# Altium PCB P450_FJ_P_A_V2.3_F.PcbDoc
Units mil, origin at the board's own origin, x right, y up, seen from the top; angles counter-clockwise.
Board outline 3672.05 x 2795.28 mil, 4 copper layers (Top Layer, POWER, GND, Bottom Layer); 158 components, 72 nets, 807 pads, 85 vias.
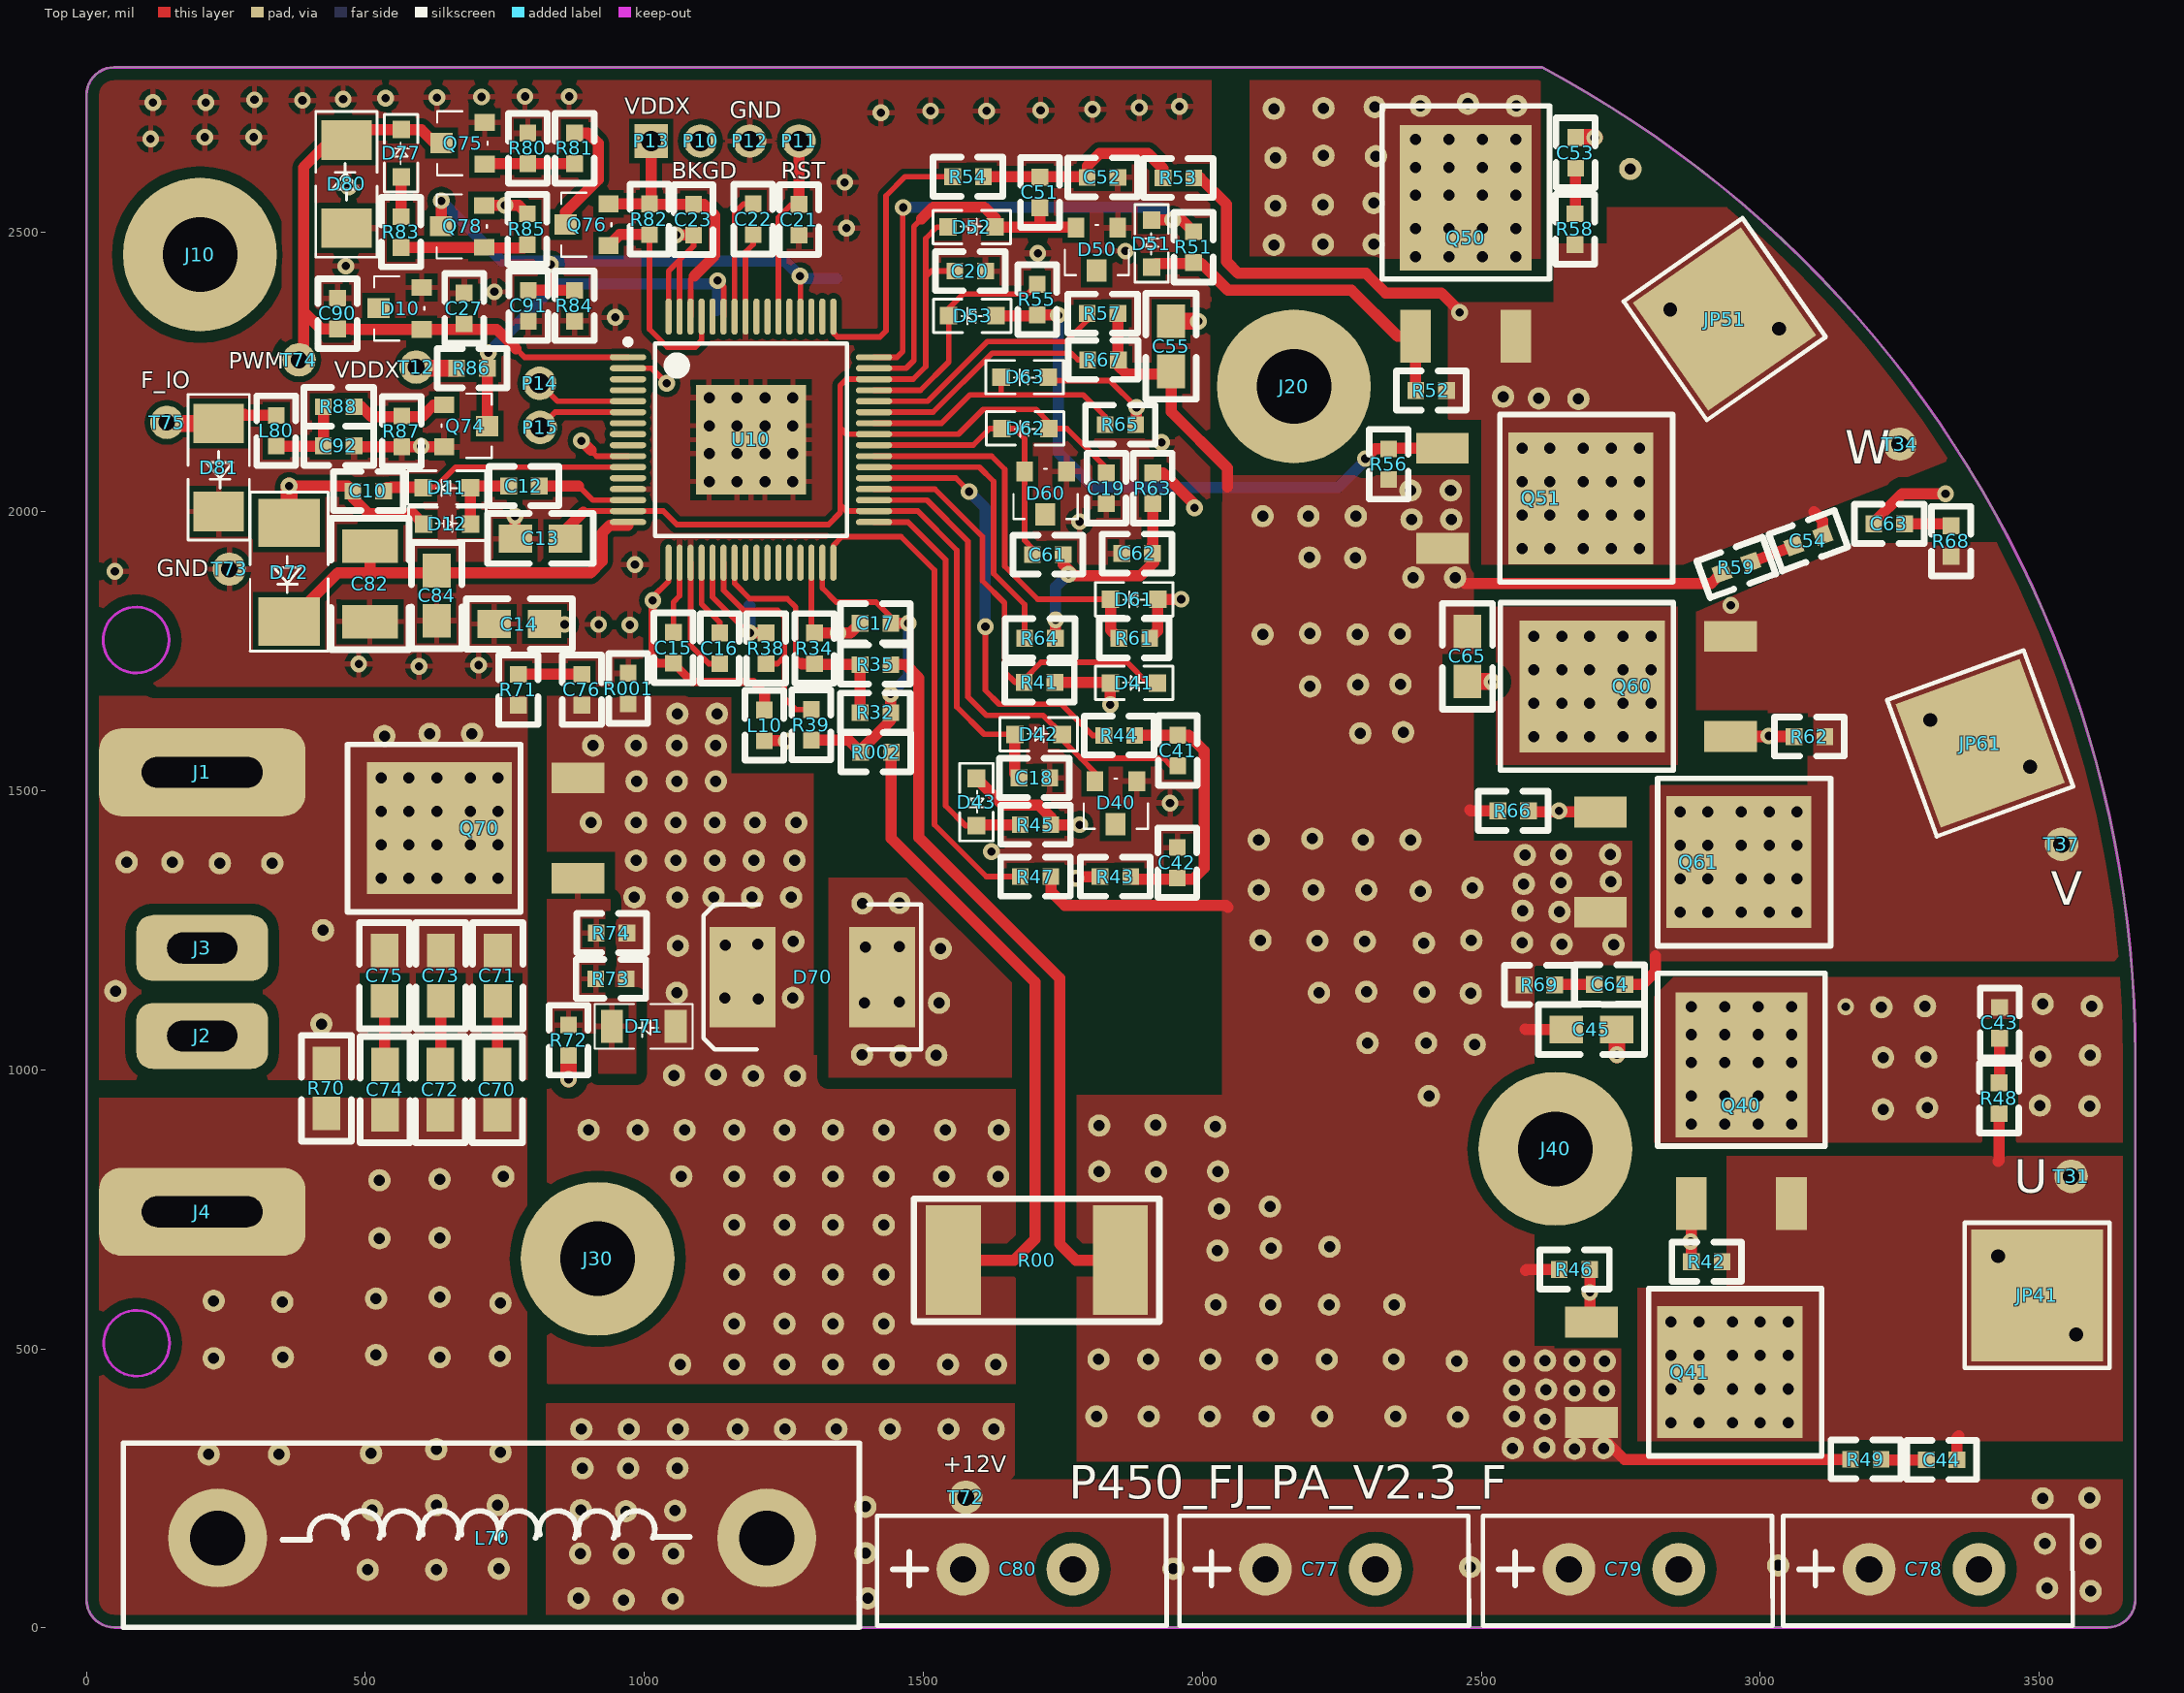
[diagram p0: Top Layer view]
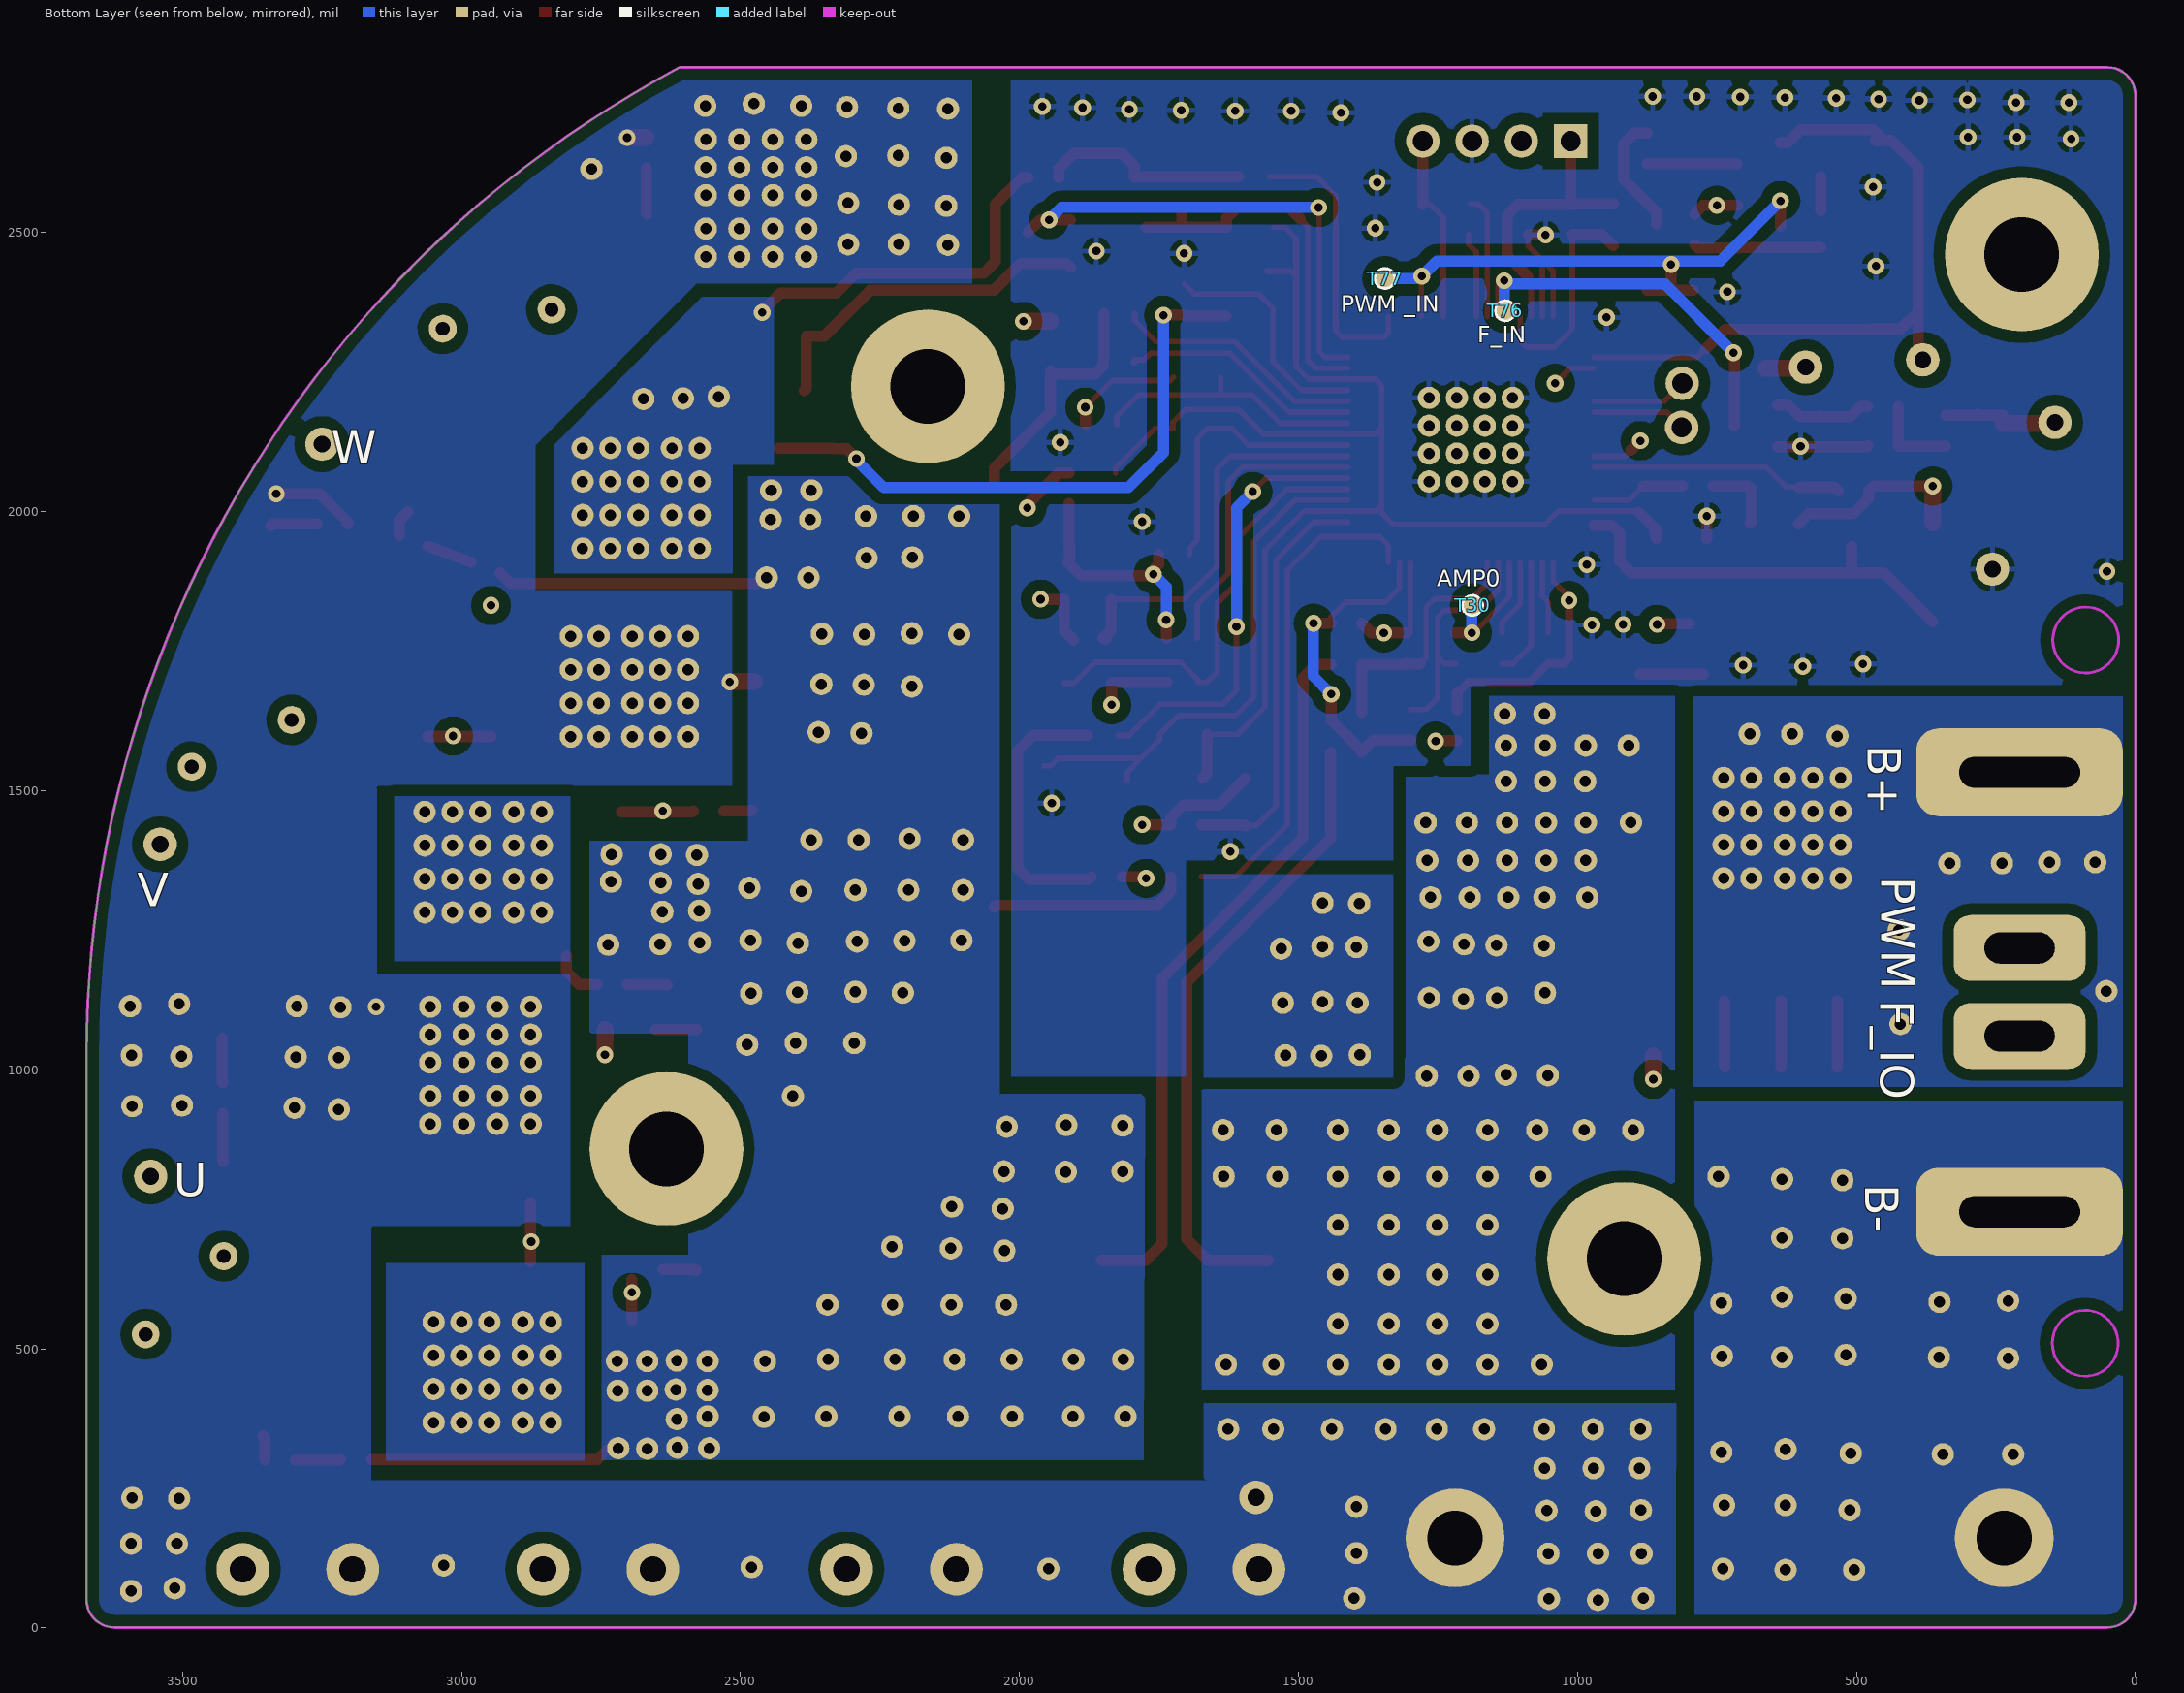
[diagram p1: Bottom Layer view, seen from below]
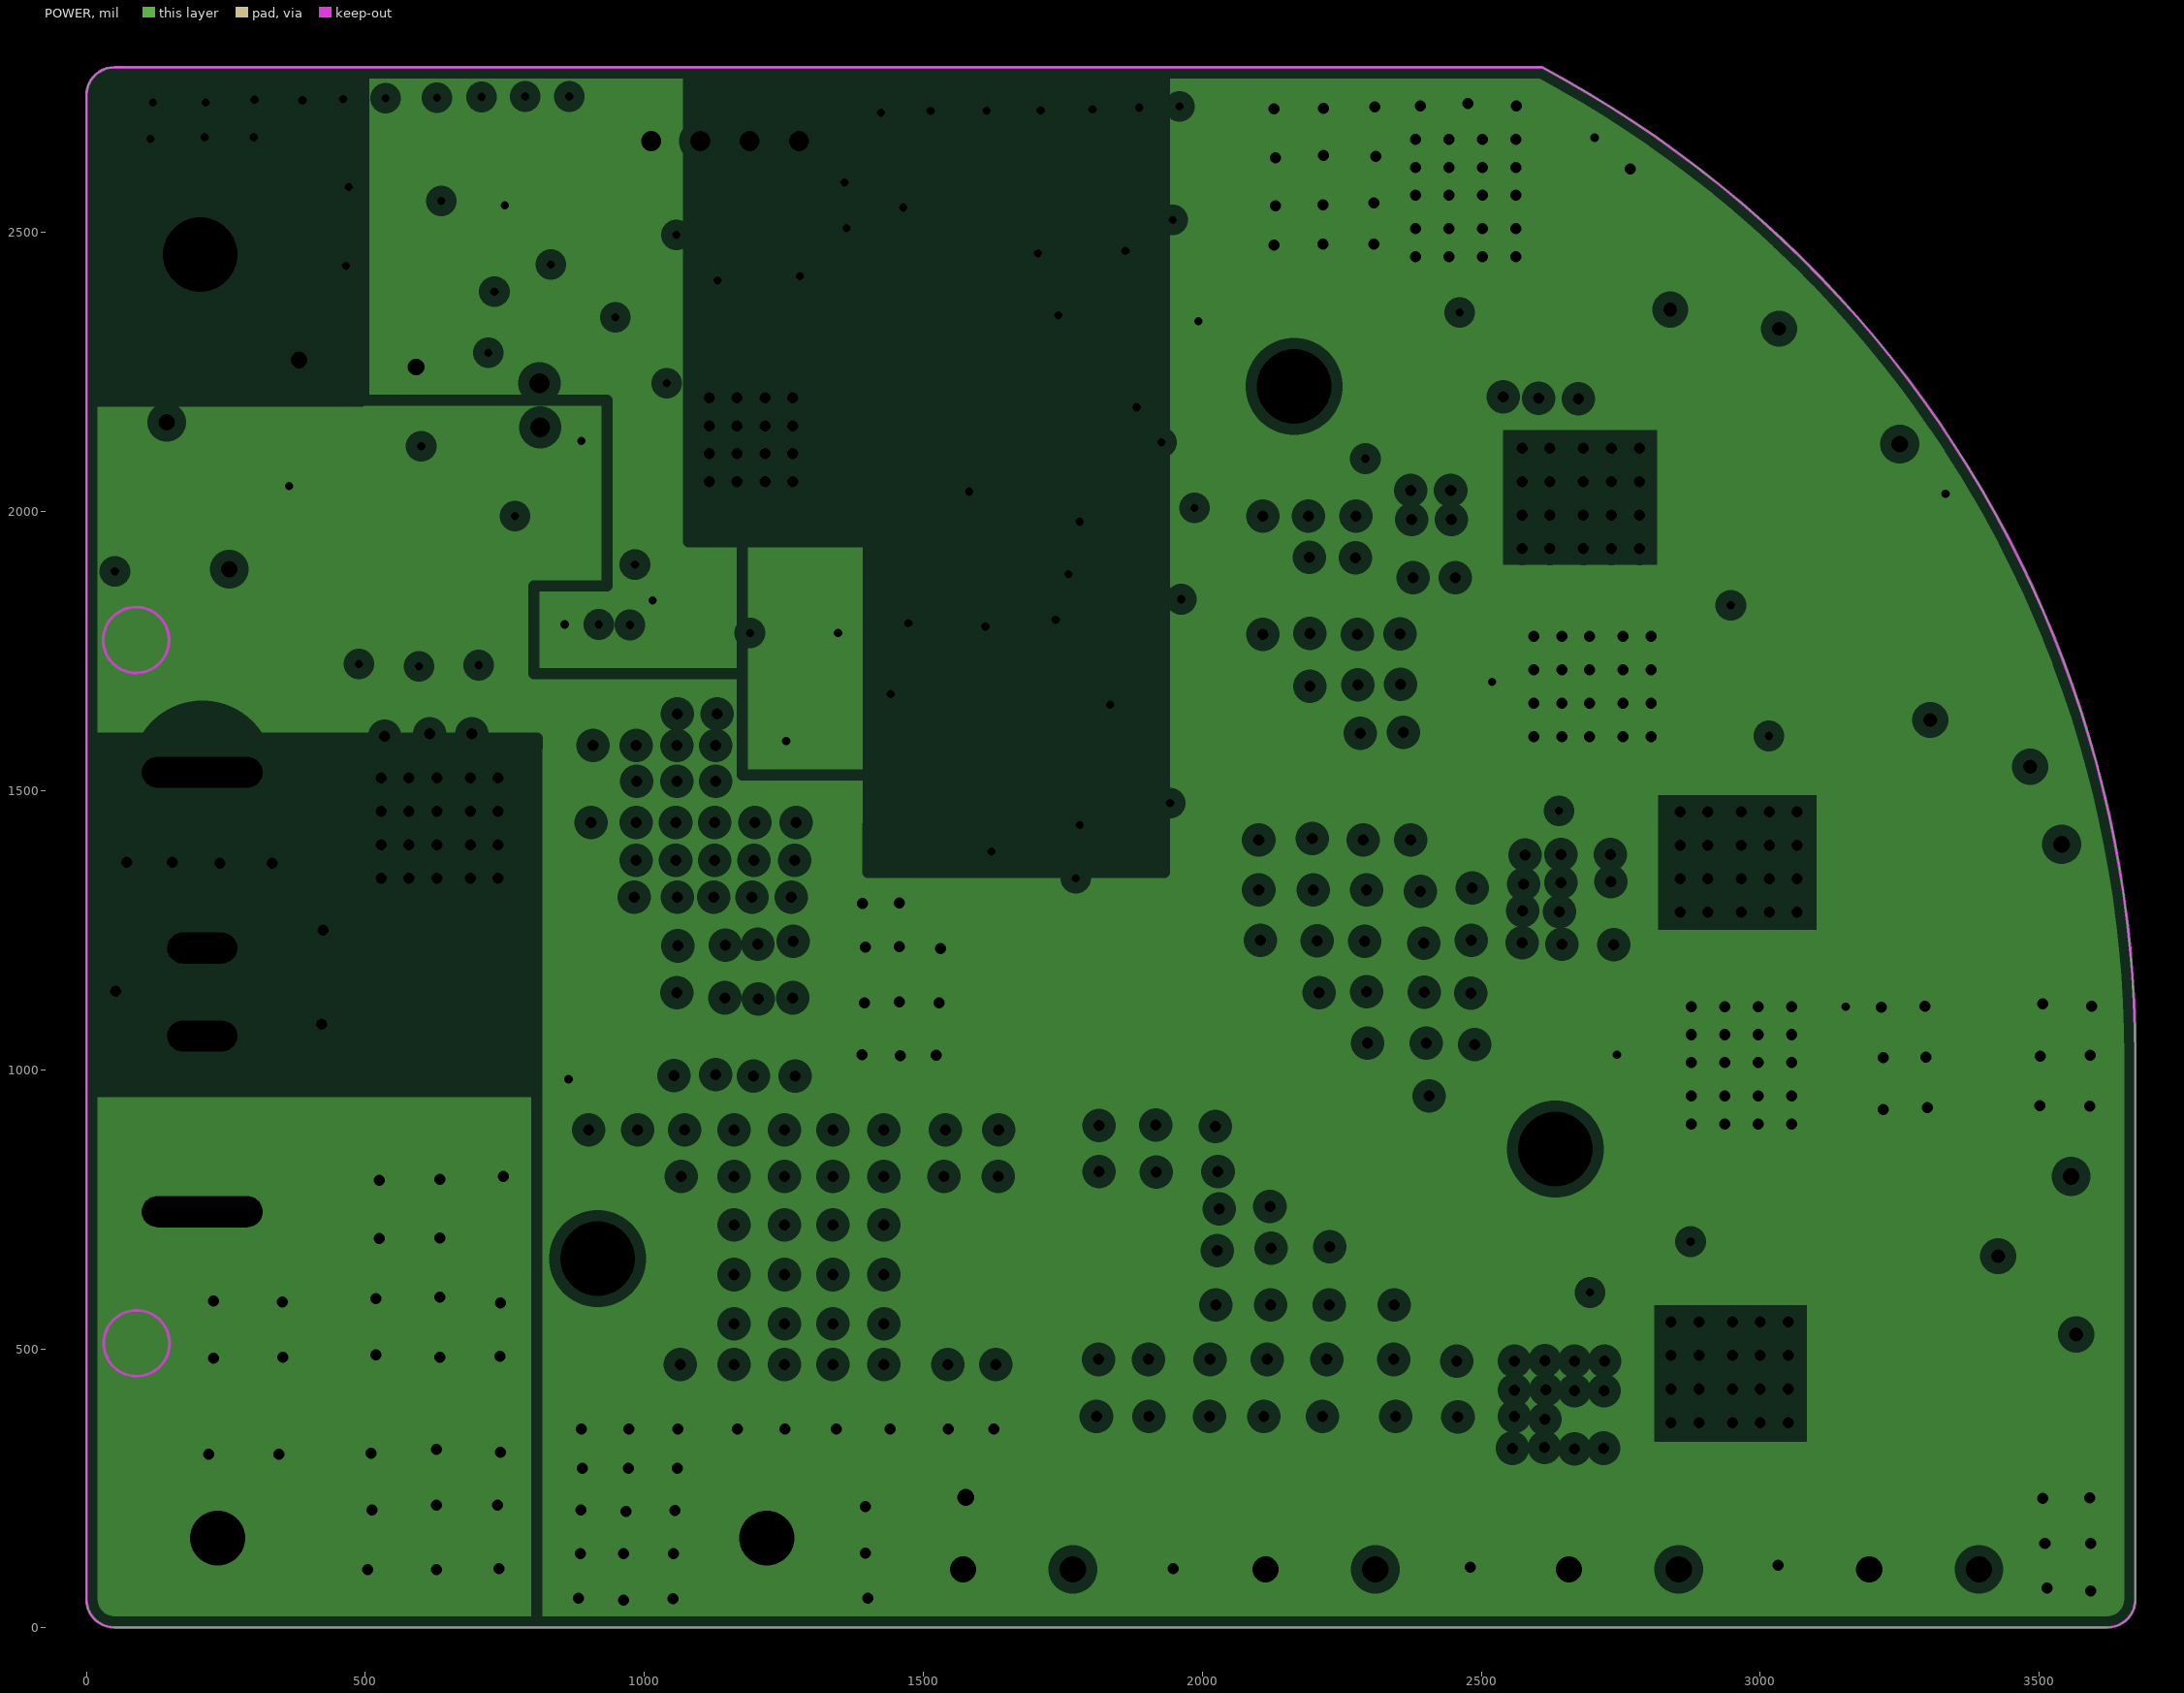
[diagram p2: POWER, clearances drawn from the general rule]
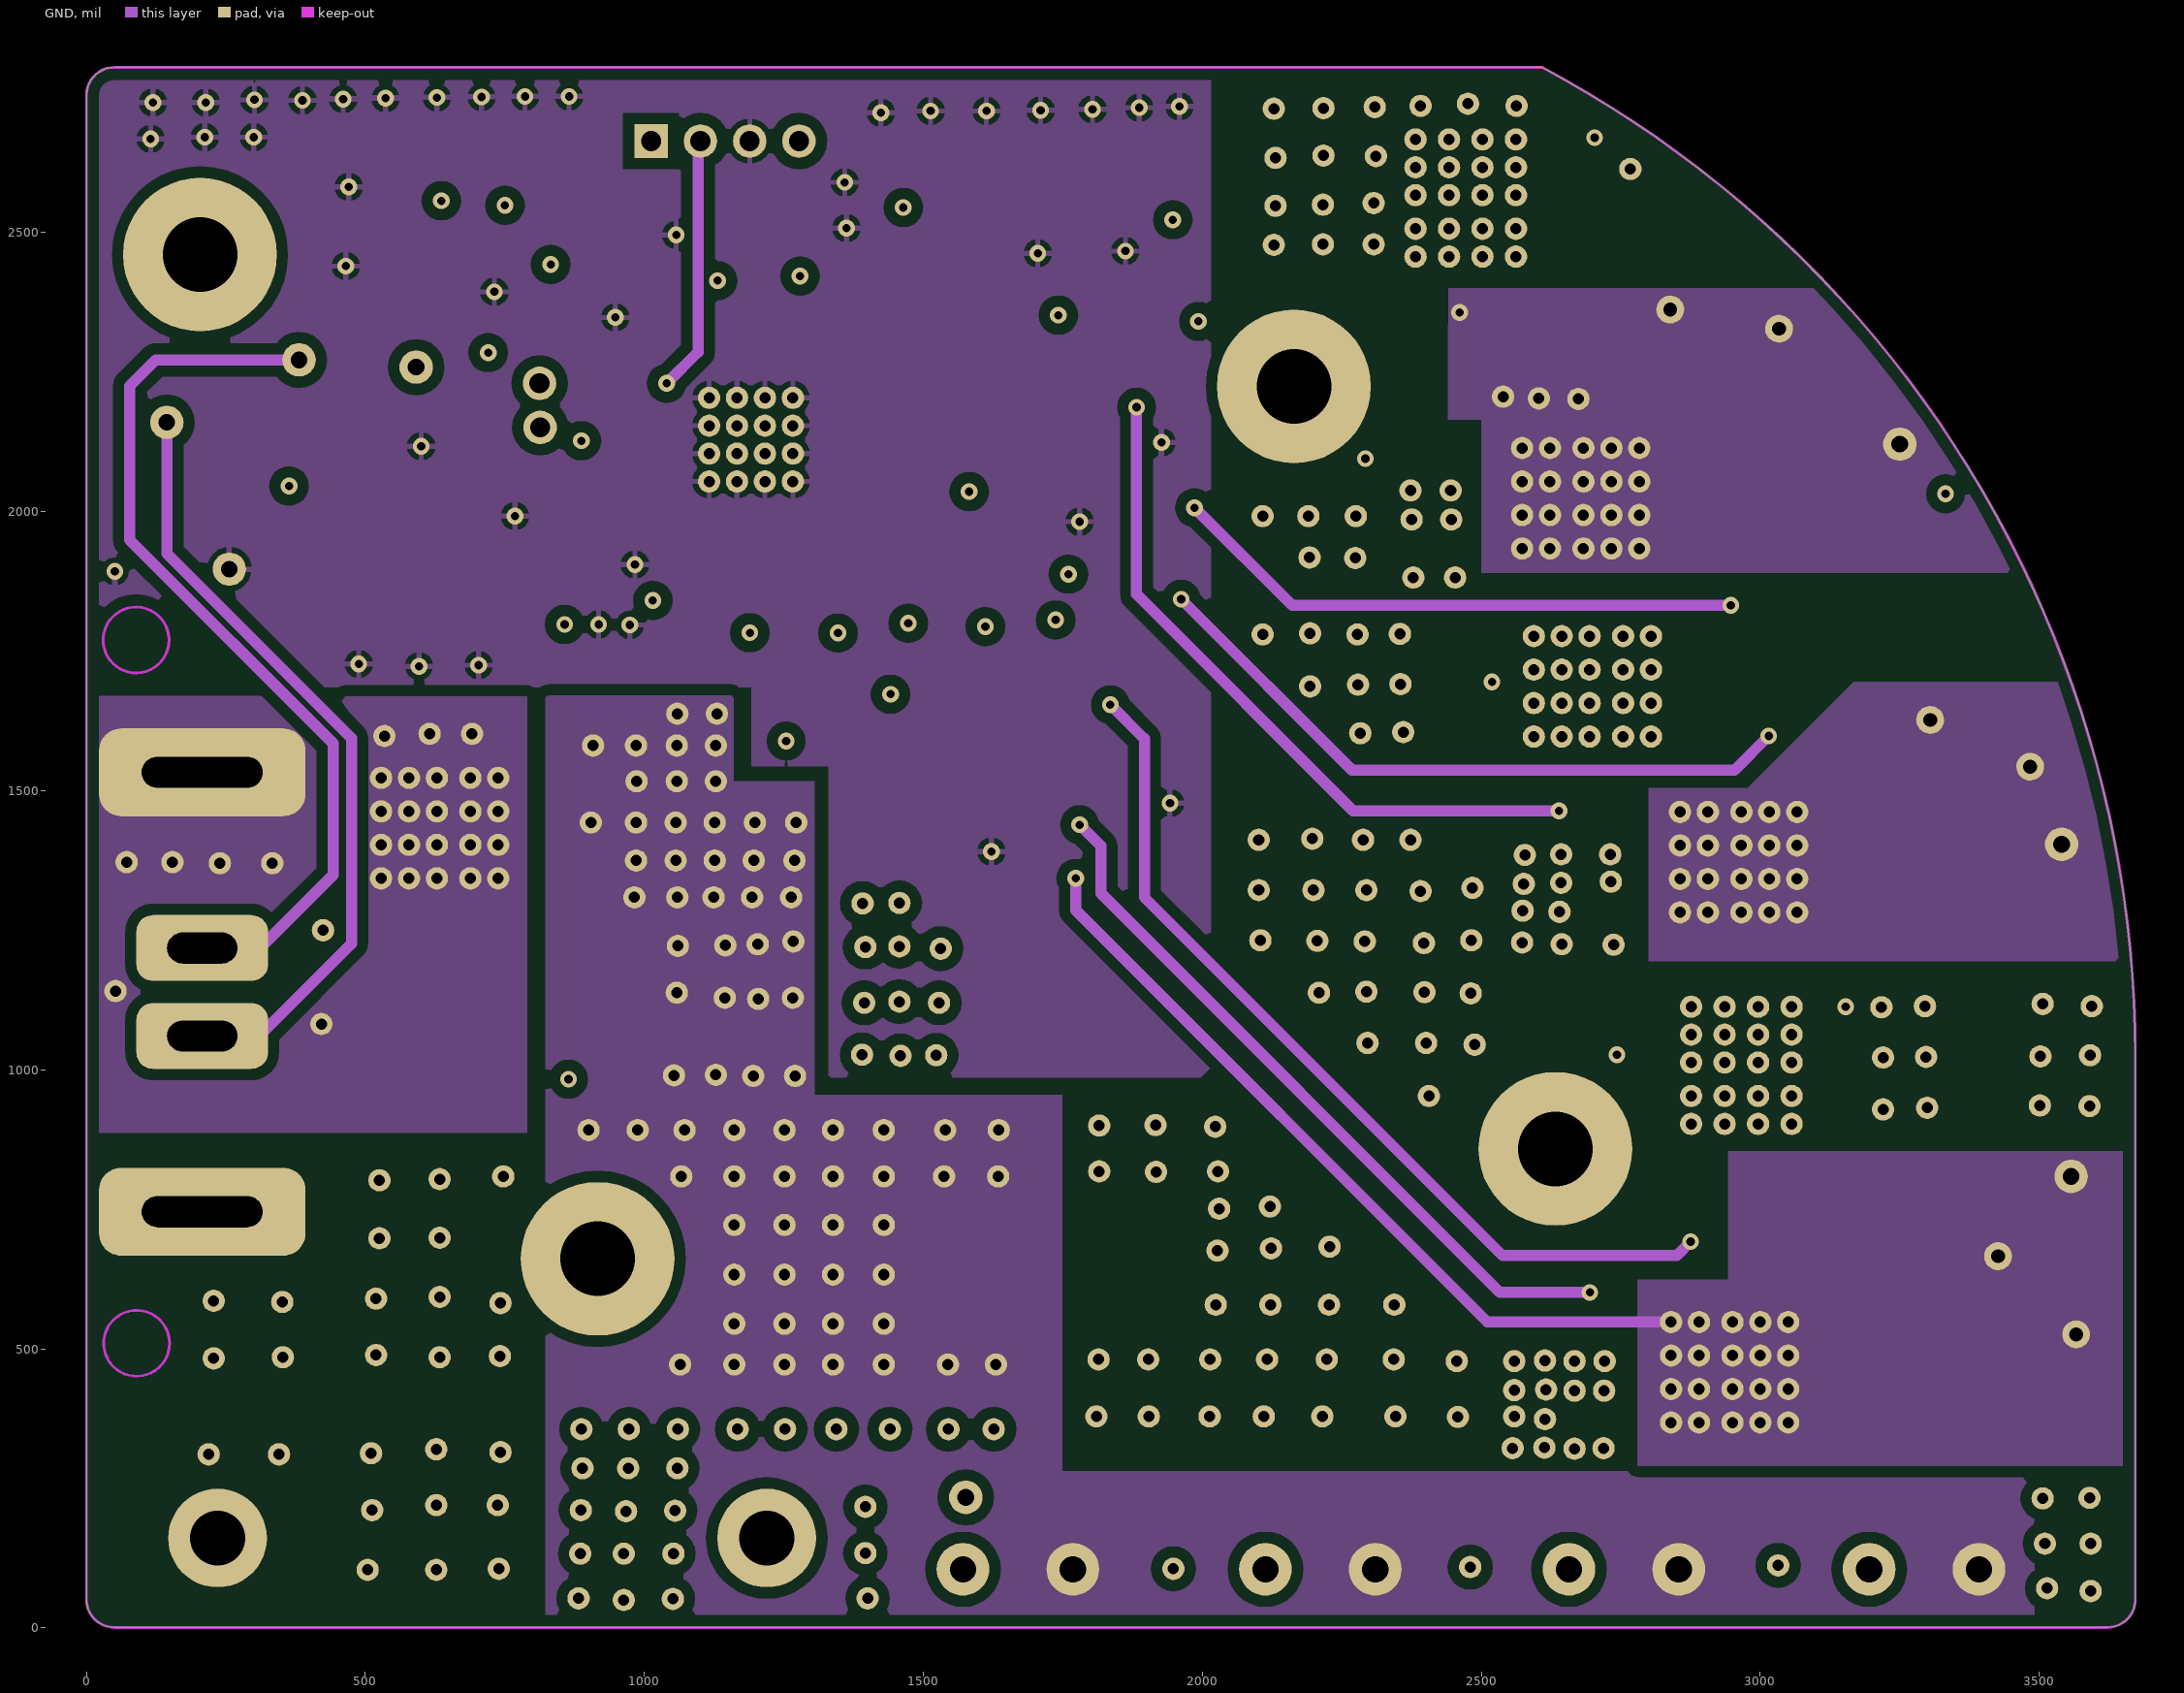
[diagram p3: GND]

## Layer stack, top to bottom
Top Layer: signal copper 1.4
Dielectric: prepreg 12.6, FR-4, Dk 4.8
POWER: plane copper 1.4, net (Multiple Nets)
Dielectric: core 12.6, FR-4, Dk 4.8
GND: signal copper 1.4
Dielectric: prepreg 12.6, FR-4, Dk 4.8
Bottom Layer: signal copper 1.4

## Board outline
0.02,50.87 0.02,2746.15 cw(c50.03,2746.15) 50.02,2796.15 2608.61,2796.15 cw(c1665.04,1024.75) 3672.07,1024.5 3672.07,50.87 cw(c3622.07,50.88) 3622.07,0.87 50.02,0.87 cw(c50.03,50.88)

## Design rules (kind name [scope] priority, off if disabled: settings)
Clearance [All] p1: gap=8
HoleSize [All] p1: absolutevalues=TRUE maxlimit=200 minlimit=1 maxpercent=80.000 minpercent=20.000
PlaneClearance [All] p1: clearance=20
PlaneConnect [All] p1: planeconnectstyle=Direct reliefexpansion=20 reliefentries=4 reliefconductorwidth=10 reliefairgap=10
PolygonConnect [All] p1: connectstyle=Relief reliefconductorwidth=10 reliefentries=4 polygonreliefangle="90 Angle" airgapwidth=10
RoutingVias [All] p1: holewidth=15 width=30 viastyle="Through Hole" minholewidth=15 minwidth=30 maxholewidth=28 maxwidth=50
SolderMaskExpansion [All] p1: expansion=4
UnConnectedPin [All] p1:
Width [All] p1: maxlimit=200 minlimit=10 preferedwidth=20 minimp=50.000000 maximp=50.000000 favimp=50.000000
25 further rules are at their usual default settings.

## Components (designator, comment, footprint, x,y, rotation, side; value= is the part's Value field where it differs from the comment)
C10 "0.1uF/50V" 0603 505,2037 r180 top
C12 "0.01uF/50V" 0603 784,2046 r0 top
C13 "10uF/16V" 0805 859,1952 r180 top
C14 "10uF/16V" 0805 821,1798.87 r180 top
C15 "0.1uF/50V" 0603 1052,1756 r90 top
C16 "0.1uF/50V" 0603 1135,1755 r90 top
C17 "0.1uF/50V" 0603 1414,1800 r0 top
C18 "0.1uF/50V" 0603 1699,1523 r180 top
C19 "0.1uF/50V" 0603 1828,2042 r90 top
C20 "0.1uF/50V" 0603 1584,2431 r180 top
C21 "0.1uF/50V" 0603 1277,2523 r270 top
C22 "0.1uF/50V" 0603 1195,2524 r270 top
C23 "0.1uF/50V" 0603 1088,2523 r90 top
C27 "220pF/50V" 0603 677,2364 r90 top
C41 "0.1uF/50V" 0603 1956,1572 r90 top
C42 "3.3nF/50V" 0603 1955,1371 r270 top
C43 "1nF/50V" 0603 3429,1084 r90 top
C44 "1nF/50V" 0603 3325,301 r0 top
C45 "1uF/50V" 0805 2652,1072 r0 top
C51 "0.1uF/50V" 0603 1709,2572 r90 top
C52 "3.3nF/50V" 0603 1821,2599 r180 top
C53 "1nF/50V" 0603 2669,2643 r90 top
C54 "1nF/50V" 0603 3086,1948 r20 top
C55 "1uF/50V" 0805 1944,2251 r90 top
C61 "0.1uF/50V" 0603 1723,1923 r0 top
C62 "3.3nF/50V" 0603 1883,1925 r0 top
C63 "1nF/50V" 0603 3231,1978 r180 top
C64 "1nF/50V" 0603 2730,1153 r0 top
C65 "1uF/50V" 0805 2475,1786 r270 top
C70 "1uF/50V" 0805 736,1010 r270 top
C71 "1uF/50V" 0805 737,1214 r270 top
C72 "0.22uF/50V" 0805 634,1010 r270 top
C73 "0.22uF/50V" 0805 635,1214 r270 top
C74 "100pF/50V" 0805 535,1010 r270 top
C75 "100pF/50V" 0805 534,1214 r270 top
C76 "1nF/50V" 0603 888,1681 r90 top
C77 "EGPD350E__132MK20H" RB5.0 2113,105 r180 top locked
C78 "EGPD350E__132MK20H" RB5.0 3195,105 r180 top locked
C79 "EGPD350E__132MK20H" RB5.0 2657,105 r180 top locked
C80 "EGPD350E__132MK20H" RB5.0 1571,105 r180 top locked
C82 "10uF/50V" 1210 508,1803 r90 top
C84 "0.22uF/50V" 0805 628,1804 r90 top
C90 "1nF/50V" 0603 450,2355 r270 top
C91 "10pF/50V" 0603 792,2369 r270 top
C92 "10pF/50V" 0603 452,2118 r0 top
D10 "MMBZ27VCLT1" SOT-23T#1 520,2365 r90 top
D11 "BAS16H" SOD323 688,2043 r180 top
D12 "BAS16H" SOD323 604,1978 r0 top
D40 "MMBZ27VCLT1" SOT-23T#1 1844,1436 r180 top
D41 "BAS16H" SOD323 1835,1693 r0 top
D42 "BAS16H" SOD323 1664,1601 r0 top
D43 "BAS16H" SOD323 1595,1522 r270 top
D50 "MMBZ27VCLT1" SOT-23T#1 1810,2428 r180 top
D51 "BAS16H" SOD323 1909,2438 r90 top
D52 "BAS16H" SOD323 1544,2510 r0 top
D53 "BAS16H" SOD323 1630,2351 r180 top
D60 "MMBZ27VCLT1" SOT-23T#1 1718,1991 r180 top
D61 "BAS16H" SOD323 1920,1843 r180 top
D62 "BAS16H" SOD323 1725,2149 r180 top
D63 "BAS16H" SOD323 1724,2241 r180 top
D70 "SMDJ30CA" DO-214AB 1176,1166 r180 top
D71 "BZT52HC10WF" SOD123 1056,1078 r180 top
D72 "MBRS260T3G" SMB403A-03 363,1980 r270 top
D77 "BAS16H" SOD323 564,2600 r90 top
D80 "SMAJ12CA" SMA/DO-214AC 466,2508 r90 top
D81 "SMAJ12CA" SMA/DO-214AC 237,2158 r270 top
J1 "B+" POWER 207.48,1533 r0 top locked
J2 "F_IO" IO 207.48,1060.63 r0 top locked
J3 "PWM" IO 207.48,1218.11 r0 top locked
J4 "B-" POWER 207.48,745.67 r0 top locked
J10 "M3" PADS 203.54,2460.63 r0 top locked
J20 "M3" PADS 2164.17,2224.41 r0 top locked
J30 "M3" PADS 916.14,661.42 r0 top locked
J40 "M3" PADS 2632.68,858.27 r0 top locked
JP41 "U" UVW1 3496,596 r0 top locked
JP51 "W" UVW1 2936,2345 r35 top locked
JP61 "V" UVW1 3394,1585 r20 top locked
L10 "KMZ1608YHR102BTD" 0603 1215,1617 r90 top
L70 "100uH/50A" L10-20 235,161 r0 top locked
L80 "KMZ1608YHR102BTD" 0603 340,2145 r270 top
P10 "BKGD" TEST_S1 1100.33,2664 r90 top locked
P11 "RST" TEST_S1 1277,2664 r0 top locked
P12 "GND" TEST_S1 1188.67,2664 r90 top locked
P13 "VDDX" TEST_S2 1012,2664 r90 top locked
P14 "MISO_RX" TEST_S1 812,2230 r90 top
P15 "MOSI_TX" TEST_S1 813,2151 r90 top
Q40 "IPD100N04S4-02" TO-252 2966,843 r0 top locked
Q41 "IPD100N04S4-02" TO-252 2780,458 r270 top locked
Q50 "IPD100N04S4-02" TO-252 2472,2397 r0 top locked
Q51 "IPD100N04S4-02" TO-252 2513,2024 r270 top
Q60 "IPD100N04S4-02" TO-252 2864,1687 r90 top
Q61 "IPD100N04S4-02" TO-252 2796,1372 r270 top
Q70 "IPD100N04S4-02" TO-252 798,1433 r90 top locked
Q74 "2N3904" SOT-23T#2 642,2193 r270 top
Q75 "2N3904" SOT-23T#2 713,2621 r90 top
Q76 "2N3906" SOT-23T#1 855,2515 r90 top
Q78 "2N3906" SOT-23T#1 632,2512 r90 top
R00 "LRS1050FEDHR001" 1050 1853,659 r180 top
R001 "0R" 0603 971,1683 r90 top
R002 "0R" 0603 1415,1569 r0 top
R32 "40.2K/1%" 0603 1414,1640 r180 top
R34 "40.2K/1%" 0603 1305,1755 r270 top
R35 "3.3K/1%" 0603 1414,1726 r180 top
R38 "80.6K/1%" 0603 1218,1755 r90 top
R39 "3.3K/1%" 0603 1299,1618 r270 top
R41 "10R" 0603 1708,1694 r180 top
R42 "20K" 0603 2904,656 r0 top
R43 "10R" 0603 1844,1346 r0 top
R44 "10R" 0603 1851,1599 r180 top
R45 "10R" 0603 1701,1439 r180 top
R46 "20K" 0603 2667,642 r180 top
R47 "0R" 0603 1701,1346 r180 top
R48 "10R" 0603 3428,949 r90 top
R49 "10R" 0603 3189,302 r0 top
R51 "10R" 0603 1984,2474 r90 top
R52 "20K" 0603 2410,2217 r0 top
R53 "10R" 0603 1957,2598 r180 top
R54 "10R" 0603 1580,2600 r180 top
R55 "10R" 0603 1704,2380 r90 top
R56 "20K" 0603 2334,2085 r270 top
R57 "0R" 0603 1821,2355 r180 top
R58 "10R" 0603 2668,2506 r90 top
R59 "10R" 0603 2957,1900 r20 top
R61 "10R" 0603 1878,1773 r180 top
R62 "20K" 0603 3088,1597 r0 top
R63 "10R" 0603 1911,2042 r270 top
R64 "10R" 0603 1709,1773 r180 top
R65 "10R" 0603 1853,2156 r180 top
R66 "20K" 0603 2557,1464 r180 top
R67 "0R" 0603 1822,2272 r180 top
R68 "10R" 0603 3342,1947 r90 top
R69 "10R" 0603 2604,1152 r0 top
R70 "100K" 0805 430,1012 r270 top
R71 "10R" 0603 774,1681 r270 top
R72 "2K" 0603 864,1053 r270 top
R73 "10K" 0603 940,1163 r180 top
R74 "20K" 0603 941,1245 r0 top
R80 "2K" 0603 791,2651 r90 top
R81 "1K/1%" 0603 875,2651 r90 top
R82 "1K/1%" 0603 1009,2524 r270 top
R83 "2K" 0603 564,2501 r90 top
R84 "10K" 0603 875,2369 r90 top
R85 "1K/1%" 0603 790,2506 r90 top
R86 "10K" 0603 691,2257 r0 top
R87 "2K" 0603 565,2144 r90 top
R88 "1K/1%" 0603 452,2188 r180 top
T12 "VDDX" TEST_S 591,2259 r90 top
T30 "AMP0" TEST-1 1188,1832 r90 bottom
T31 "U" TEST_S 3557,809 r0 top
T34 "W" TEST_S 3250,2121 r90 top
T37 "V" TEST_S 3540,1404 r90 top
T72 "+12V" TEST_S 1576,234 r90 top
T73 "GND" TEST_S 256,1897 r90 top
T74 "PWM" TEST_S 381,2272 r90 top
T75 "F_IO" TEST_S 144,2160 r90 top
T76 "F_IN" TEST-1 1129,2360 r90 bottom
T77 "PWM _IN" TEST-1 1345,2418 r90 bottom
U10 "S912ZVML64MKH" 64LQFP 1191,2129 r0 top locked

## Footprints (in the part's own frame and the unit in brackets; to place one, negate y for a bottom-side part, rotate by r counter-clockwise, add the part's x,y. Pads: shape width x height; smd on the part's side, far side on the other; paste and mask are expansions set on the pad)
64LQFP [mm] "TSQFP, 64-Leads, Body 10.00x10.00mm, Pitch 0.50mm, IPC Medium Density"
  oval 1.65x0.28 smd: 1(-5.6,3.75) 2(-5.6,3.25) 3(-5.6,2.75) 4(-5.6,2.25) 5(-5.6,1.75) 6(-5.6,1.25) 7(-5.6,0.75) 8(-5.6,0.25) 9(-5.6,-0.25) 10(-5.6,-0.75) 11(-5.6,-1.25) 12(-5.6,-1.75) 13(-5.6,-2.25) 14(-5.6,-2.75) 15(-5.6,-3.25) 16(-5.6,-3.75) 33(5.6,-3.75) 34(5.6,-3.25) 35(5.6,-2.75) 36(5.6,-2.25) 37(5.6,-1.75) 38(5.6,-1.25) 39(5.6,-0.75) 40(5.6,-0.25) 41(5.6,0.25) 42(5.6,0.75) 43(5.6,1.25) 44(5.6,1.75) 45(5.6,2.25) 46(5.6,2.75) 47(5.6,3.25) 48(5.6,3.75)
  oval 0.28x1.65 smd: 17(-3.75,-5.6) 18(-3.25,-5.6) 19(-2.75,-5.6) 20(-2.25,-5.6) 21(-1.75,-5.6) 22(-1.25,-5.6) 23(-0.75,-5.6) 24(-0.25,-5.6) 25(0.25,-5.6) 26(0.75,-5.6) 27(1.25,-5.6) 28(1.75,-5.6) 29(2.25,-5.6) 30(2.75,-5.6) 31(3.25,-5.6) 32(3.75,-5.6) 49(3.75,5.6) 50(3.25,5.6) 51(2.75,5.6) 52(2.25,5.6) 53(1.75,5.6) 54(1.25,5.6) 55(0.75,5.6) 56(0.25,5.6) 57(-0.25,5.6) 58(-0.75,5.6) 59(-1.25,5.6) 60(-1.75,5.6) 61(-2.25,5.6) 62(-2.75,5.6) 63(-3.25,5.6) 64(-3.75,5.6)
  round 1.016 hole 0.508: 65(-1.905,-1.905) 65(-1.905,-0.635) 65(-1.905,0.635) 65(-1.905,1.905) 65(-0.635,-1.905) 65(-0.635,-0.635) 65(-0.635,0.635) 65(-0.635,1.905) 65(0.635,-1.905) 65(0.635,-0.635) 65(0.635,0.635) 65(0.635,1.905) 65(1.905,-1.905) 65(1.905,-0.635) 65(1.905,0.635) 65(1.905,1.905)
  rect 5x5 smd: 65(0,0)
  silkscreen extent -5.72,-4.37 4.38,4.57, body extent -5,-5 5,5, height 1.6
0603 [mil]
  rect 30x30 smd: 1(-27.5,0) 2(27.5,0)
  silkscreen extent -62,-35 63,35
0805 [mil]
  rect 60x50 smd: 1(0.36,0.13) 2(90.36,0.13)
  silkscreen extent -50,-45 140,45
1050 [mm]
  rect 2.5x5 smd: 1(0,0) 2(7.6,0)
  silkscreen extent -1.78,-2.79 9.4,2.79, body extent 2.21,-1.23 5.41,1.27, height 0.95
1210 [mil]
  rect 60x100 smd: 1(0,0) 2(135,0)
  silkscreen extent -50,-70 185,70
DO-214AB [mil]
  rect 118.11x180 smd: 1(-250.06,-0.22) 2(-0.06,-0.22)
  silkscreen extent -320,-130 70,130
IO [mm]
  rrect50% 6x3 hole 1.4 slot 3.2 at 0 deg: 1(0,0)
L10-20 [mm]
  round 4.5 hole 2.5: 1(0,0) 2(25,0)
  silkscreen extent -4.29,-4.06 29.21,4.32, body extent 6.54,-3.81 19.36,4.17, height 8.25
PADS [mm]
  round 7 hole 3.4: 1(0,0)
POWER [mm]
  rrect50% 9.4x4 hole 1.4 slot 5.5 at 0 deg: 1(0,0)
RB5.0 [mm]
  round 2.4 hole 1.2: 1(0,0) 2(-5,0)
  silkscreen extent -9.27,-2.44 3.91,2.57, body extent -6.89,-0.61 1.16,13.21, height 9.03
SMA/DO-214AC [mm]
  rect 1.8x2.3 smd: 1(4,0) 2(0,0)
  silkscreen extent -1.32,-1.4 5.31,1.4
SMB403A-03 [mm]
  rect 2.2x2.8 smd: 1(4.5,0) 2(0,0)
  silkscreen extent -1.4,-1.78 5.84,1.78
SOD123 [mm]
  rect 1x1.5 smd: 1(2.9,0) 2(0,0)
  silkscreen extent -0.76,-1.02 3.68,1.02
SOD323 [mm]
  rect 0.8x0.8 smd: 1(2.15,0) 2(0,0)
  silkscreen extent -0.69,-0.76 2.84,0.76
SOT-23T#1 [mil]
  rect 30x36 smd: 1(-38.39,-80.76) 2(36.61,-80.76)
  rect 36x40 smd: 3(-0.39,-3.76)
  silkscreen extent -58,-86 57,4
SOT-23T#2 [mil]
  rect 30x36 smd: 1(1.61,-0.76) 2(76.61,-0.76)
  rect 36x40 smd: 3(39.61,76.24)
  silkscreen extent -18,-6 97,84
TEST-1 [mil]
  round 40 smd: 1(0,0)
  silkscreen extent -18,-18 18,18
TEST_S [mil]
  round 60 hole 30: 1(0,0)
TEST_S1 [mil]
  round 60 hole 36: 1(0,0)
TEST_S2 [mil]
  rect 60x60 hole 36: 1(0,0)
TO-252 [mil]
  rect 55.12x94.49 smd: 1(-89.76,-82.68) 3(89.76,-82.68)
  round 40 hole 20: 2(-90,60) 2(-90,110) 2(-90,170) 2(-90,220) 2(-90,270) 2(-30,60) 2(-30,110) 2(-30,170) 2(-30,220) 2(-30,270) 2(30,60) 2(30,110) 2(30,170) 2(30,220) 2(30,270) 2(90,60) 2(90,110) 2(90,170) 2(90,220) 2(90,270)
  rect 236.22x259.84 smd: 2(0,165.35)
  silkscreen extent -150,20 150,330
UVW1 [mil]
  round 50 hole 25: 1(-70,70) 1(70,-70)
  rect 236.22x236.22 smd: 1(0,0)
  silkscreen extent -130,-130 130,130

## Part data
C10 C12 C13 C14 C15 C16 C17 C18 C19 C20 C21 C22 C23 C27 C41 C42 C43 C44 C45 C51 C52 C53 C54 C55 C61 C62 C63 C64 C65 C70 C71 C72 C73 C74 C75 C76 C82 C84 C90 C91 C92: library part Cap, "Capacitor"
C77 C78 C79 C80: library part "Cap Pol1"
D10 D40 D50 D60: "D_TVS"
D11 D12 D41 D42 D43 D51 D52 D53 D61 D62 D63 D77: library part Diode, "Default Diode"
D70 D80 D81: library part TVS_D, "Tunnel Diode - RLC Model"
D71: library part "D Zener", "Zener Diode"
D72: library part "Diode BAT17", "Silicon RF Schottky Diode for Mixer Applications in the VHF/UHF Range"
J1 J2 J3 J4: library part J1X1, "Header"
J10 J20 J30 J40: library part CON1
JP41 JP51 JP61: library part "HDR 1X1", "Header"
L10: library part "Inductor Iron Dot", "Magnetic-Core Inductor with Winding Polarity Marking"
L70: library part Inductor, "AFDIGOQQQQ092R5MR1"
L80: library part Inductor, "Inductor"
P10 P11 P12 P13 P14 P15: library part Header1, "Header"
Q40 Q41 Q50 Q51 Q60 Q61 Q70: library part MOSFET-N, "N-Channel MOSFET"
Q74 Q75: library part MMBTA06, "NPN General Purpose Amplifier"
Q76 Q78: "PNP General Purpose Amplifier"
R00 R001 R002 R32 R34 R35 R38 R39 R41 R42 R43 R44 R45 R46 R47 R48 R49 R51 R52 R53 R54 R55 R56 R57 R58 R59 R61 R62 R63 R64 R65 R66 R67 R68 R69 R70 R71 R72 R73 R74 R80 R81 R82 R83 R84 R85 R86 R87 R88: library part Res1, "Resistor"
T12 T30 T31 T34 T37 T72 T73 T74 T75 T76 T77: library part TEST
U10: library part PC9S12ZVML12MKH_1, "MCU"

## Free pads (board coordinates)
  round 40 hole 20: 0(421,1082) 1(1338,722) 2(424,1250) 2(1161,545) 2(3295,1114) 3(52,1141) 3(3297,1023) 4(3299,932) 5(2644,1225) 5(3594,1114) 6(2737,1224) 6(3591,1026) 7(2453,1882) 7(3590,935) 8(1457,1221) 8(2614,479) 9(1394,1120) 9(2556,322) 10(1396,1220) 10(2578,1385) 11(1391,1298) 11(2640,1283) 12(1457,1299) 12(2576,1333) 13(1531,1217) 13(2643,1335) 14(1457,1122) 14(2732,1337) 15(1528,1120) 15(2559,379) 16(1390,1027) 16(2616,427) 17(1459,1025) 17(2614,374) 18(1523,1026) 18(2613,323) 19(886,211) 19(2720,425) 20(885,133) 20(2719,322) 21(882,53) 21(2667,478) 22(967,209) 22(2667,425) 23(963,133) 23(2667,321) 24(963,50) 24(2375,1986) 25(1055,210) 25(2446,1986) 26(1052,133) 26(1948,106) 27(1051,52) 27(2480,109) 28(1396,217) 28(3032,112) 29(1396,134) 30(1400,53) 31(72,1372) 32(154,1372) 33(239,1370) 34(333,1370) 35(534,1598) 36(615,1602) 37(691,1602) 39(525,802) 40(633,804) 41(747,809) 42(525,698) 43(633,699) 44(228,586) 45(351,584) 46(519,590) 47(633,593) 48(742,582) 49(228,483) 50(352,485) 51(519,489) 52(633,485) 53(741,487) 54(219,311) 55(345,311) 56(510,313) 57(627,320) 58(742,315) 59(512,211) 60(627,220) 61(737,220) 62(504,104) 63(627,104) 64(739,106) 65(908,1581) 66(985,1581) 67(1059,1638) 68(1130,1638) 69(904,1443) 70(985,1443) 71(986,1517) 72(1058,1517) 73(1058,1581) 74(1128,1581) 75(1128,1517) 76(1056,1443) 77(1126,1443) 78(1198,1443) 79(1272,1443) 80(1056,1375) 81(1126,1375) 82(1196,1375) 83(1269,1375) 84(1059,1309) 85(1124,1309) 86(1193,1309) 87(1263,1309) 88(1060,1222) 89(1058,1138) 90(1053,990) 91(1128,991) 92(1195,989) 93(1270,989) 94(900,892) 95(988,892) 96(1072,892) 97(1161,892) 98(1251,892) 99(1338,892) 100(1429,892) 101(1539,892) 102(1635,892) 103(1066,809) 104(1161,809) 105(1251,809) 106(1338,809) 107(1429,809) 108(1537,809) 109(1634,809) 110(1161,722) 111(1161,633) 112(1251,722) 113(1429,722) 114(1251,633) 115(1338,633) 116(1429,633) 117(1251,545) 118(1338,545) 119(1429,545) 120(1064,472) 121(1161,472) 129(1630,472) 130(1544,472) 131(1429,472) 132(1338,472) 133(1251,472) 134(1145,1223) 135(1203,1225) 136(1144,1129) 137(1204,1127) 138(1267,1230) 139(1266,1129) 140(2128,2722) 141(2217,2723) 142(2309,2725) 143(2391,2727) 144(2563,2727) 145(2131,2634) 146(2217,2638) 147(2311,2637) 148(2131,2548) 149(2216,2550) 150(2307,2553) 151(2128,2478) 152(2216,2479) 153(2307,2479) 154(2767,2614) 155(2539,2206) 156(2603,2203) 157(2674,2202) 158(3217,1112) 159(3220,1022) 160(3220,929) 161(3506,1118) 162(3502,1024) 163(3501,936) 164(3506,232) 165(3510,151) 166(3514,71) 167(3590,233) 168(3592,151) 169(3592,66) 170(2476,2731) 171(2108,1992) 172(2190,1992) 173(2275,1992) 174(2373,2038) 175(2445,2038) 176(2192,1918) 177(2274,1917) 178(2378,1882) 179(2108,1780) 180(2193,1782) 181(2278,1780) 182(2354,1781) 183(2193,1687) 184(2279,1690) 185(2355,1691) 186(2283,1603) 187(2360,1605) 188(2101,1412) 189(2197,1414) 190(2288,1412) 191(2373,1412) 192(2101,1322) 193(2199,1322) 194(2294,1322) 195(2391,1320) 196(2484,1326) 197(2574,1285) 198(2731,1386) 199(2643,1386) 200(2104,1232) 201(2206,1231) 202(2291,1230) 203(2397,1227) 204(2482,1232) 205(2573,1228) 206(2209,1138) 207(2294,1140) 208(2398,1139) 209(2481,1137) 210(2296,1048) 211(2401,1048) 212(2488,1045) 213(1815,900) 214(1916,901) 215(2023,898) 216(1815,818) 217(1917,817) 218(2028,818) 219(1814,481) 220(1810,379) 221(1903,481) 222(2014,481) 223(1904,379) 224(2013,379) 225(2721,478) 226(2559,478) 227(2559,426) 228(2458,378) 229(2346,379) 230(2215,379) 231(2110,379) 232(2456,478) 233(2343,481) 234(2223,481) 235(2116,481) 236(2024,579) 237(2122,579) 238(2227,579) 239(2344,579) 240(2027,676) 241(2123,680) 242(2228,683) 243(2121,755) 244(2030,751) 245(2406,953) 246(985,1375) 247(982,1309) 248(889,286) 249(971,286) 250(1059,286) 252(1626,356) 253(1545,356) 254(887,356) 255(972,356) 256(1060,356) 257(1167,356) 258(1252,356) 259(1344,356) 260(1440,356)

## Via types
v1: diameter 30, hole 15, Top Layer to Bottom Layer, 85 vias

## Nets (pads, with @x,y where several pads share a name; then routed paths per layer and width w, separated by ;. In a path a pad name is that pad's centre, name@x,y a point inside that pad or via, vN(x,y) a via of type N, cw(c..) or ccw(c..) an arc to the next point about the centre after c; other vN are vias at no path point)
+12V: C10.2 C43.2 C45.2 C53.2 C55.2 C63.2 C65.2 C77.1 C78.1 C79.1 C80.1 D12.2 D70.1 D72.2 L70.2 pad.2@3295,1114 pad.3@3297,1023 pad.4 pad.5@3594,1114 pad.6@3591,1026 pad.7@3590,935 pad.8@1457,1221 pad.9@1394,1120 pad.10@1396,1220 pad.11@1391,1298 pad.12@1457,1299 pad.13@1531,1217 pad.14@1457,1122 pad.15@1528,1120 pad.16@1390,1027 pad.17@1459,1025 pad.18@1523,1026 pad.19@886,211 pad.20@885,133 pad.21@882,53 pad.22@967,209 pad.23@963,133 pad.24@963,50 pad.25@1055,210 pad.26 pad.27 pad.28 pad.29 pad.30 pad.140 pad.141 pad.142 pad.143 pad.144 pad.145 pad.146 pad.147 pad.148 pad.149 pad.150 pad.151 pad.152 pad.153 pad.154 pad.158 pad.159 pad.160 pad.161 pad.162 pad.163 pad.164 pad.165 pad.166 pad.167 pad.168 pad.169 pad.170 pad.248 pad.249 pad.250 pad.252 pad.253 pad.254 pad.255 pad.256 pad.257 pad.258 pad.259 pad.260 Q40.2 Q50.2 Q60.2 R72.2 T72.1 U10.10 | length 802
  Top Layer w10: 904,2110 914.53,2099.47 U10.10
  Top Layer w20: v1(363,2046) 468.5,2046 C10.2 477.5,2024.5 506,1996 586,1996 D12.2 ; v1(887,2127) 904,2110 ; C63.2 3203.5,1981.28 3254.22,2032 v1(3332,2032)
  Top Layer w30: D72.2 v1(363,2046) ; v1(864,983) R72.2 ; C55.2 v1@1989.64,2341.36 ; C65.2 2518.36,1695.64 v1(2519,1695) ; C53.2 2702.5,2670.5 v1(2703,2670) ; C45.2 v1(2743,1027)
  other v1: 3153,1113 1993,2341
AGND: C17.2 R002.1 R32.1 R39.2 U10.31 | length 596.6
  Top Layer w10: U10.31 1318.95,1863.05 1344,1838 1415,1838 1441.5,1811.5 C17.2
  Top Layer w20: R39.2 1366,1590.5 R002.1 1387.5,1572.28 1441.5,1626.28 1441,1626.78 v1(1441,1673) ; C17.2 v1(1473,1800)
  Bottom Layer w20: v1(1441,1673) 1473,1705 v1(1473,1800)
AMP0: R38.2 T30.1 U10.21 | length 233.6
  Top Layer w10: U10.21 1122.1,1846.9 v1@1186.5,1782.5
  Top Layer w20: v1@1186.5,1782.5 R38.2
  Bottom Layer w20: T30.1 1189,1831 v1(1189,1783)
AMPM0: R38.1 R39.1 U10.22 | length 418.2
  Top Layer w10: U10.22 1141.79,1859.21 1178,1823 1239,1823 1251,1811 1251,1740 ; R38.1 1238.5,1727.5 1251,1740 ; R39.1 1271.5,1645.5 1251,1666 1251,1740
AMPP0: R32.2 R34.2 R35.2 U10.23 | length 458.2
  Top Layer w10: U10.23 1161.47,1871.53 1189,1844 1256,1844 1271,1829 1271,1739 1282,1728
  Top Layer w20: 1282,1728 1282.5,1727.5 R34.2 ; R34.2@1305,1728 1307,1726 R35.2 ; R32.2 R35.2@1386.5,1723
BAT+: C70.2 C72.2 C74.2 J4.1 L70.1 pad.39 pad.40 pad.41 pad.42 pad.43 pad.44 pad.45 pad.46 pad.47 pad.48 pad.49 pad.50 pad.51 pad.52 pad.53 pad.54 pad.55 pad.56 pad.57 pad.58 pad.59 pad.60 pad.61 pad.62 pad.63 pad.64 R70.2
BAT-: C71.1 C73.1 C75.1 J1.1 pad.0 pad.2@424,1250 pad.3@52,1141 pad.31 pad.32 pad.33 pad.34 pad.35 pad.36 pad.37 Q70.2 R70.1 R71.2
BKGD: P10.1 U10.2 | length 539.6
  Top Layer w10: U10.2 1013.05,2256.95 v1(1040,2230)
  GND w20: v1(1040,2230) 1096,2286 1096,2659.67 P10.1
CP: C12.2 U10.14 | length 169.5
  Top Layer w10: 882,2046 907.27,2020.73 U10.14
  Top Layer w20: C12.2 882,2046
F_IN: Q74.3 R86.2 T76.1 U10.59 | length 720.6
  Top Layer w10: v1(1131,2414) 1141.79,2403.21 U10.59
  Top Layer w20: Q74.3 718.5,2153.65 R86.2 718.5,2283.5 v1(720,2285)
  Bottom Layer w20: v1(720,2285) 843,2408 1068,2408 1125,2408 v1(1131,2414) 1131,2362 T76.1
F_IO: D81.2 J2.1 L80.1 T75.1 | length 1606.8
  Top Layer w20: D81.2@237,2172.5 285,2172.5 ; 283,2174.5 285,2172.5 ; L80.1 285,2172.5
  Top Layer w30: T75.1 146,2158 D81.2
  GND w20: T75.1 144,1925 475,1594 475,1226 309.63,1060.63 J2.1
GND: C13.2 C14.2 C15.2 C16.1 C18.1 C19.1 C20.1 C21.2 C22.2 C23.1 C27.2 C42.1 C52.1 C62.1 C82.1 C84.1 C90.1 C91.2 C92.2 D10.2 D40.1 D50.1 D60.1 D80.2 D81.1 P12.1 Q74.2 Q75.2 R001.2 R80.2 R84.1 R87.1 T73.1 U10.13 U10.18 U10.19 U10.57 U10.63 U10.64 U10.65 | length 996.7
  Top Layer w10: U10.64 1043.36,2431.36 1063.05,2451.05 ; C15.2 1052,1838 1063.05,1849.05 U10.18 ; U10.63 1063.05,2451.05 ; U10.19 1082.73,1760.27 1115.5,1727.5 C16.1 ; C23.1 1088,2476 1063.05,2451.05 ; U10.57 1181.16,2465.16 1195,2479 C22.2
  Top Layer w20: C92.2 481.11,2116.39 R87.1@565.11,2116.39 ; R87.1 R87.1@565.11,2116.39 ; Q74.2 R87.1@565.11,2116.39 ; v1(768,1992) 768,1952.5 C13.2 ; v1(1057,2496) 1057.5,2495.5 C23.1
  other v1: 1622,1391 1942,1478 596,1723 703,1725 488,1727 974,1797 918,1798 51,1893 983,1905 1780,1982 600,2117 1927,2124 948,2348 731,2394 465,2440 1705,2463 1862,2467 1362,2508 470,2582 1359,2590 115,2668 212,2671 300,2671 1424,2715 1513,2718 1613,2718 1710,2719 1803,2721 1887,2724 1959,2726 119,2733 214,2733 387,2737 301,2738 460,2739 536,2741 628,2742 708,2743 786,2744 865,2744
GND_L: C76.1 C77.2 C78.2 C79.2 C80.2 D70.2 D71.2 pad.1 pad.2@1161,545 pad.65 pad.66 pad.67 pad.68 pad.69 pad.70 pad.71 pad.72 pad.73 pad.74 pad.75 pad.76 pad.77 pad.78 pad.79 pad.80 pad.81 pad.82 pad.83 pad.84 pad.85 pad.86 pad.87 pad.88 pad.89 pad.90 pad.91 pad.92 pad.93 pad.94 pad.95 pad.96 pad.97 pad.98 pad.99 pad.100 pad.101 pad.102 pad.103 pad.104 pad.105 pad.106 pad.107 pad.108 pad.109 pad.110 pad.111 pad.112 pad.113 pad.114 pad.115 pad.116 pad.117 pad.118 pad.119 pad.120 pad.121 pad.129 pad.130 pad.131 pad.132 pad.133 pad.134 pad.135 pad.136 pad.137 pad.138 pad.139 pad.246 pad.247 Q70.3 R00.2 R001.1 R002.2 R73.1 R74.2 | length 1141
  Top Layer w20: R002.2 1442.5,1414.5 1700,1157 1700,696.42 1662.58,659 R00.2
HG0: D41.1 R41.2 U10.36 | length 803.8
  Top Layer w10: U10.36 1520.58,2040.42 1606,1955 1606,1876 1645.5,1836.5 1645.5,1712.85 1664.35,1694 R41.2 1680.5,1699.5 1711,1730 1865,1730 1902,1693 D41.1
HG1: D51.1 R51.2 U10.48 | length 890.1
  Top Layer w10: U10.48 1452.64,2276.64 1463,2287 1463,2544 v1(1464,2545)
  Top Layer w20: D51.1 1962.85,2522.65 R51.2
  Bottom Layer w20: v1(1464,2545) 1925,2545 v1(1947,2523)
HG2: D61.1 R61.2 U10.39 | length 708.6
  Top Layer w10: U10.39 1622.53,2099.47 1646,2076 1646,1902 1705,1843 D61.1@1833,1843
  Top Layer w20: D61.1 1835.35,1788.15 R61.2 ; R61.2@1845.5,1771 1847,1772.5 R61.2@1847,1773
HS0: R44.2 U10.37 | length 794.6
  Top Layer w10: U10.37 1557.9,2060.1 v1(1582,2036) ; v1(1611,1794) 1611,1680 1636,1655 1747.36,1655 1803.36,1599 R44.2
  Bottom Layer w20: v1(1582,2036) 1611,2007 v1(1611,1794)
HS1: R54.2 U10.49 | length 506.7
  Top Layer w10: U10.49 1338.64,2320.36 1346,2313 1422,2313 1433,2324 1433,2566 1467,2600 R54.2
HS2: R64.2 U10.38 | length 529.2
  Top Layer w10: U10.38 1600.21,2079.79 1626,2054 1626,1889 1681.5,1833.5 R64.2
I_SENSE: C45.1 C55.1 C65.1 pad.5@2644,1225 pad.6@2737,1224 pad.7@2453,1882 pad.8@2614,479 pad.9@2556,322 pad.10@2578,1385 pad.11@2640,1283 pad.12@2576,1333 pad.13@2643,1335 pad.14@2732,1337 pad.15@2559,379 pad.16@2616,427 pad.17@2614,374 pad.18@2613,323 pad.19@2720,425 pad.20@2719,322 pad.21@2667,478 pad.22@2667,425 pad.23@2667,321 pad.24@2375,1986 pad.25@2446,1986 pad.171 pad.172 pad.173 pad.174 pad.175 pad.176 pad.177 pad.178 pad.179 pad.180 pad.181 pad.182 pad.183 pad.184 pad.185 pad.186 pad.187 pad.188 pad.189 pad.190 pad.191 pad.192 pad.193 pad.194 pad.195 pad.196 pad.197 pad.198 pad.199 pad.200 pad.201 pad.202 pad.203 pad.204 pad.205 pad.206 pad.207 pad.208 pad.209 pad.210 pad.211 pad.212 pad.213 pad.214 pad.215 pad.216 pad.217 pad.218 pad.219 pad.220 pad.221 pad.222 pad.223 pad.224 pad.225 pad.226 pad.227 pad.228 pad.229 pad.230 pad.231 pad.232 pad.233 pad.234 pad.235 pad.236 pad.237 pad.238 pad.239 pad.240 pad.241 pad.242 pad.243 pad.244 pad.245 Q41.3 Q51.3 Q61.3 R00.1 R35.1 R46.2 R47.1 R49.1 R56.2 R57.1 R59.1 R66.2 R67.1 R69.1 | length 3201.7
  Top Layer w20: R35.1 1468,1726 1492,1702 1492,1416 1744,1164 1744,688 1773,659 R00.1 ; R47.1 1728.5,1319.5 1753.5,1294.5 2042.5,1294.5 2046,1291 ; R57.1 1848.5,2273 R67.1 1849.5,2261.5 1864,2247 1939.5,2247 C55.1 1943.87,2179.13 2045,2078 2045,2044 ; 2471,1871 2911.56,1871 R59.1 ; 2479,1466 2481,1464 R66.2 ; 2578,1073 2578.87,1072.13 C45.1 ; 2579,640 2581,642 R46.2 ; pad.20@2728,330 2756,302 R49.1
LG0: D43.1 R45.2 U10.33 | length 746.7
  Top Layer w10: U10.33 1472.64,1981.36 1540,1914 1540,1473 1576,1437 1576.35,1437.35 D43.1
  Top Layer w20: D43.1 1596.65,1439 R45.2
LG1: D53.1 R55.2 U10.45 | length 427.4
  Top Layer w10: U10.45 1494.58,2217.58 1545.35,2268.35 D53.1 1545.35,2364.35 1571,2390 1686.5,2390 R55.2
LG2: D63.1 R65.2 U10.42 | length 498
  Top Layer w10: U10.42 1532.53,2158.53 1583.25,2209.25 1641,2209.25 ; D63.1 1639.35,2210.9 1641,2209.25 ; R65.2 1825.5,2170.5 1786.75,2209.25 1641,2209.25
LS0: R47.2 U10.32 | length 891.7
  Top Layer w10: U10.32 1338.64,1939.64 1354,1955 1460,1955 1520,1895 1520,1439 1613,1346 R47.2
LS1: R57.2 U10.44 | length 454.4
  Top Layer w10: U10.44 1507.9,2197.9 1615,2305 1756,2305 1793.5,2342.5 R57.2
LS2: R67.2 U10.43 | length 447.4
  Top Layer w10: U10.43 1517.21,2178.21 1623,2284 1765,2284 1777,2272 R67.2@1787.5,2272 ; R67.2@1793.5,2266 R67.2@1787.5,2272 ; R67.2 R67.2@1790.5,2272 ; R67.2@1795.5,2267 R67.2@1790.5,2272 ; R67.2@1787.5,2272 R67.2@1790.5,2272
MISO_RX: P14.1 U10.5 | length 171.8
  Top Layer w10: P14.1 844.1,2197.9 U10.5
MOSI_TX: P15.1 U10.6 | length 168.8
  Top Layer w10: P15.1 840.21,2178.21 U10.6
NetC12_1: C12.1 D11.2 D12.1 | length 128.4
  Top Layer w20: D11.2@688,2041 688,1981.65 D12.1@690.65,1979 ; D11.2@692,2044 694,2046 C12.1
NetC16_2: C16.2 U10.20 | length 139.5
  Top Layer w10: U10.20 1102.42,1834.58 1135,1802 C16.2
NetC22_1: C22.1 U10.58 | length 223.2
  Top Layer w10: U10.58 1161.47,2535.47 1177.5,2551.5 C22.1@1192,2551.5
NetC41_2: C41.2 C42.2 R43.2 R44.1 | length 489
  Top Layer w20: R43.2 1876.5,1341 1983,1341 2003,1361 2003,1572 1975.5,1599.5 C41.2 1955.5,1599 R44.1
NetC43_1: C43.1 R48.2 | length 80.4
  Top Layer w20: R48.2 3429,977.5 C43.1
NetC44_1: C44.1 R49.2 | length 81.4
  Top Layer w20: R49.2 3217.5,301 C44.1
NetC44_2: C44.2 JP41.1 Q40.3 Q41.2 R42.2 R43.1 R48.1 T31.1 | length 1605.2
  Top Layer w20: v1(1773,1343) 1776,1346 R43.1 ; C44.2 3352.5,340.5 3356,344 ; 3426,836 3428,838 R48.1
  GND w20: v1(1773,1343) 1773,1286 2511,548 Q41.2@2840,548
NetC51_2: C51.2 C52.2 R53.2 R54.1 | length 380.4
  Top Layer w20: R54.1 1792.5,2600 C52.2 1793.5,2619.5 1816,2642 1902.5,2642 1929.5,2615 R53.2
NetC53_1: C53.1 R58.2 | length 82.4
  Top Layer w20: R58.2 2669,2534.5 C53.1
NetC54_1: C54.1 R59.2 | length 82.6
  Top Layer w20: R59.2 C54.1
NetC54_2: C54.2 JP51.1 pad.155 pad.156 pad.157 Q50.3 Q51.2 R52.2 R53.1 R58.1 T34.1 | length 687
  Top Layer w20: R53.1 1996,2598 2043,2551 2043,2448 2064,2427 2293,2427 2328.43,2391.57 2428.43,2391.57 2461,2359 v1(2461,2357) ; 3096,2000 3111.84,1984.16 C54.2
NetC61_2: C61.2 C62.2 R63.2 R64.1 | length 429.9
  Top Layer w20: R64.1 1737,1773.5 v1(1737,1806) ; C61.2 1750.5,1905.5 1771,1885 1889,1885 1913,1909 1910.5,1911.5 C62.2 1910.5,1940.5 1911,1941 R63.2
  Bottom Layer w20: v1(1737,1806) 1737,1865 v1(1760,1888)
NetC63_1: C63.1 R68.2 | length 84.9
  Top Layer w20: C63.1 3338.5,1978 R68.2
NetC64_1: C64.1 R69.2 | length 71.4
  Top Layer w20: R69.2 2632.5,1153 C64.1
NetC64_2: C64.2 JP61.1 Q60.3 Q61.2 R62.2 R63.1 R68.1 T37.1 | length 1903.9
  Top Layer w20: R63.1 1929.5,2069.5 1986,2013 v1(1986,2007) ; C64.2 2789,1153 2812,1176 2812,1204
  GND w10: 2280,1836 2942,1836 v1@2946,1832 ; v1(2947,1832) v1@2946,1832 ; v1@2950.5,1827.5 v1@2946,1832
  GND w20: v1(1986,2007) 2161,1832 v1@2946,1832
NetC70_1: C70.1 C71.2 | length 118.4
  Top Layer w20: C70.1@736.13,1005.64 737.13,1006.64 C71.2
NetC72_1: C72.1 C73.2 | length 119.4
  Top Layer w20: C72.1@634.13,1004.64 635.13,1005.64 C73.2
NetC74_1: C74.1 C75.2 | length 119
  Top Layer w20: C74.1@534.13,1004.64 C75.2
NetC76_2: C76.2 R71.1 | length 114
  Top Layer w20: R71.1 C76.2
NetC92_1: C92.1 L80.2 R88.2 | length 154.7
  Top Layer w20: L80.2 424,2117.5 C92.1 R88.2
NetD41_2: D41.2 Q40.1 R41.1 R42.1 | length 1868.9
  Top Layer w20: R41.1 1834,1694 D41.2 v1(1835,1654) ; Q40.1 2876.24,656.26 R42.1
  GND w20: v1(1835,1654) 1896,1593 1896,1309 2538,667 2850,667 v1(2875,692)
NetD43_2: D43.2 Q41.1 R45.1 R46.1 | length 1612.1
  Top Layer w20: D43.2 1643,1474 1707,1474 1728.5,1452.5 R45.1 v1(1780,1439) ; Q41.1@2694.5,550.59 v1(2694.5,601) 2694.5,624
  GND w20: v1(1780,1439) 1818,1401 1818,1316 2533,601 v1(2694.5,601)
NetD51_2: D51.2 Q50.1 R51.1 R52.1 | length 628.9
  Top Layer w20: D51.2 1916,2445 1998,2445 2046,2397 2267,2397 2349.68,2314.32 Q50.1 2382.24,2296.32 2382.24,2220.26 R52.1@2385.5,2217
NetD53_2: D53.2 Q51.1 R55.1 R56.1 | length 1104.3
  Top Layer w20: D53.2 1702.5,2351 R55.1 1741.5,2352.5 v1(1742,2352) ; v1(2292,2095) 2309.5,2112.5 R56.1 2335.26,2113.76 Q51.1
  Bottom Layer w20: v1(1742,2352) 1742,2106 1805,2043 2243,2043 2292,2092 v1(2292,2095)
NetD61_2: D61.2 Q60.1 R61.1 R62.1 | length 1463
  Top Layer w20: R61.1@1903,1769.5 R61.1@1906.5,1773 ; v1(1962,1843) D61.2 R61.1@1920,1787.5 ; Q60.1 3060.26,1597.24 R62.1 ; R61.1@1906.5,1773 1920,1786.5 R61.1@1920,1787.5 ; R61.1@1906.5,1773 R61.1 R61.1@1920,1787.5
  GND w20: v1(1962,1843) 2268,1537 2954,1537 v1(3015,1598)
NetD63_2: D63.2 Q61.1 R65.1 R66.1 | length 1596.6
  Top Layer w10: D63.2 1730,2235 1834,2235 v1(1882,2187) ; v1@1875.5,2185.5 v1@1877,2184
  Top Layer w20: R65.1 1882,2157.5 v1(1882,2187) ; R66.1 2586.74,1461.76 Q61.1
  GND w20: v1(1882,2187) 1882,1852 2270,1464 v1(2639,1464)
NetD71_1: D71.1 Q70.1 R72.1 R73.2 R74.1
NetD77_2: D77.2 R83.2 | length 60.5
  Top Layer w20: R83.2@564,2539.5 D77.2
NetQ74_1: Q74.1 R87.2 R88.1 | length 180.2
  Top Layer w20: R88.1 493,2188 511,2170 R87.2@563.5,2170 ; R87.2 R87.2@563.5,2170 ; Q74.1 622.39,2191.39 601,2170 R87.2@563.5,2170
NetQ75_1: Q75.1 R80.1 R81.1 | length 161.6
  Top Layer w20: Q75.1 714.65,2623.5 R81.1
NetQ76_3: Q76.3 R81.2 | length 219.2
  Top Layer w20: Q76.3 858.76,2536.76 917,2595 917,2660 898.5,2678.5 R81.2
NetQ78_1: Q78.1 R83.1 R85.1 | length 228.5
  Top Layer w20: R83.1 564.11,2473.61 Q78.1 ; Q78.1@712.76,2472.5 784,2472.5 R85.1
PP1: Q76.1 R82.2 U10.61 | length 405.4
  Top Layer w10: R82.2 1009,2327 1041,2295 1091,2295 1102.42,2306.42 U10.61
  Top Layer w20: Q76.1 955.65,2496.5 R82.2
PWM/LIN: C27.1 C90.2 D10.1 D77.1 D80.1 J3.1 Q75.3 T74.1 U10.1 | length 2904.1
  Top Layer w10: 770,2292 785.36,2276.64 U10.1
  Top Layer w20: T74.1 389,2280 389,2359 ; D80.1 D80.1@451,2665.48 ; Q75.3 624.03,2660.61 600,2684.65 D77.1 470.17,2684.65 D80.1@451,2665.48 ; 770,2292 735.39,2326.61 D10.1 476,2326.61 475.11,2327.5 C90.2 420.5,2327.5 389,2359 ; 389,2359 389,2617 437.48,2665.48 D80.1@451,2665.48
  GND w20: J3.1 311.11,1218.11 442,1349 442,1584.57 77,1949.57 77,2225 124,2272 T74.1
PWM_IN: C91.1 Q78.3 R84.2 T77.1 U10.52 | length 1014
  Top Layer w10: v1(1279,2422) 1279.58,2421.42 U10.52
  Top Layer w20: Q78.3 v1@635.76,2556.76 ; C91.1 832,2396.5 ; v1(832,2443) 832,2396.5 ; R84.2 832,2396.5
  Bottom Layer w20: v1(636,2557) 744,2449 1252,2449 v1(1279,2422) 1283,2418 T77.1
RST: C21.1 P11.1 U10.54 | length 337.7
  Top Layer w10: U10.54 1240.21,2527.21 1263.5,2550.5 C21.1
  Top Layer w20: C21.1 P11.1
VBS0: C41.1 D40.2 D42.1 U10.35 | length 962.6
  Top Layer w10: U10.35 1506.27,2020.73 1580,1947 1580,1668 1613,1635 1714.65,1635 D42.1 1748.65,1591.35 1782,1558 ; D40.2 1807.39,1532.61 1782,1558 ; C41.1 1944.26,1544.5 1930.76,1558 1782,1558
VBS1: C51.1 D50.2 D52.1 U10.47 | length 681.7
  Top Layer w10: U10.47 1468.95,2256.95 1483,2271 1483,2511 1497,2525
  Top Layer w20: 1497,2525 1517.75,2545.75 1608.9,2545.75 1628.65,2526 D52.1 1708,2510 ; C51.1 1709,2511 1708,2510 ; D50.2 1772.15,2510 1708,2510
VBS2: C61.1 D60.2 D62.1 U10.40 | length 503.4
  Top Layer w10: U10.40 1589.16,2119.16 1619,2149 D62.1 1663,2149 1681.39,2130.61 D60.2 1681.39,1948.61 1695.5,1934.5 C61.1
VCP: C10.1 D11.1 U10.11 | length 512.2
  Top Layer w10: D11.1@596,2044 626,2044 661.79,2079.79 U10.11
  Top Layer w20: C10.1 538.5,2043 D11.1 ; C10.1@546.5,2044 D11.1@596,2044
VDDA: C17.1 L10.1 R34.1 U10.30 | length 257.2
  Top Layer w10: U10.30 1299.27,1788.23 R34.1
  Top Layer w20: L10.1 1251.5,1589.5 v1@1254,1587 ; R34.1 1369,1782.5 C17.1
  other v1: 1254,1589 1347,1782.5
VDDX: C14.1 C15.1 C23.2 L10.2 P13.1 Q76.2 Q78.2 R82.1 R85.2 R86.1 T12.1 U10.17 U10.62 | length 1181.3
  Top Layer w10: v1@1014,1841 1014,1846 1043.36,1875.36 U10.17 ; U10.62 1082.73,2415.73 1089,2422
  Top Layer w15: v1(1015,1841) 1015,1737 1023.5,1728.5 C15.1 1080,1700.5 1080,1700 1085,1695 1195,1695 1215,1675
  Top Layer w20: Q78.2 774.89,2548.61 R85.2 ; C14.1@799.64,1798.87 856.13,1798.87 v1(857,1798) ; Q76.2@934.76,2552.61 Q76.2 935.88,2551.5 R82.1 1012,2554.5 P13.1 ; R82.1@1009,2550.5 C23.2 1106.5,2550.5 1126,2531 1126,2459 1089,2422 ; L10.2 1215,1675
  Top Layer w30: T12.1@577,2258 591,2258 592,2257 R86.1
  other v1: 750,2549
VLS: C13.1 C18.2 C19.2 C20.2 D42.2 D52.2 D62.2 U10.15 U10.34 U10.41 U10.46 | length 2559.6
  Top Layer w10: 890.35,1999.35 892.05,2001.05 U10.15 1033.95,2001.05 1058,1977 1330,1977 1351,1998 1351,2012 ; 1461.87,2237.58 1465.58,2237.58 ; 1508,2425 1514,2431 C20.2 ; D52.2 1524.43,2510 1504,2489.57 1504,2260 1481.58,2237.58 1465.58,2237.58 ; D42.2 1609,1601 1560,1650 1560,1931 1489.95,2001.05 U10.34 1361.95,2001.05 1351,2012 ; D62.2 1757,2149 1828,2078 C19.2 ; D62.2@1725,2155 1725,2160.13 1702.13,2183 1607,2183 1562.84,2138.84 U10.41 1362.16,2138.84 1351,2150 ; 1351,2012 1351,2150 ; 1351,2150 1351,2226 1362.27,2237.27 U10.46 1465.27,2237.27 1465.58,2237.58
  Top Layer w20: C13.1 858.64,1967.64 C13.1@860.64,1969.64 ; C13.1@860.64,1959.87 C13.1@860.64,1969.64 ; 890.35,1999.35 C13.1@860.64,1969.64 ; D42.2 1664,1530.5 C18.2
VSUP: C82.2 C84.2 D72.1 U10.16 | length 757.1
  Top Layer w20: D72.1 450.53,1890.36 506,1890.36 ; C82.2 508,1892.36 506,1890.36 ; 970.53,1975.54 938,1975.54 924,1961.54 924,1911 903.36,1890.36 506,1890.36
pads on no net: D10.3 D40.3 D50.3 D60.3 J10.1 J20.1 J30.1 J40.1 U10.3 U10.4 U10.7 U10.8 U10.9 U10.12 U10.24 U10.25 U10.26 U10.27 U10.28 U10.29 U10.50 U10.51 U10.53 U10.55 U10.56 U10.60

## Polygon pours and split planes (outlines as drawn)
+12V on Top Layer "Top Layer-No Net 1" (solid, remove dead copper, pour order 61): 822,402 824,400 824,-19 3650,-19 3699,30 3694,35 3694,266 1658,266 1656,268 1664,268 1664,402 824,402
GND on Top Layer "Top Layer-No Net 1" (solid, remove dead copper, pour order 59): 350,2773 350,2298 350,2278 131,2278 24,2278 22,2276 22.96,2275.04 22.96,1935.97 22.96,1966.96 23,1967 303,1687 353,1687 1166,1687 1192,1687 1192,1546 1194,1544 1330,1544 1330,986 2014,986 2014,2774 2015,2775 2012,2772 352,2772
NetC64_2 on Top Layer "Top Layer-No Net 1" (solid, remove dead copper, pour order 56): 2886,1823 2885,1822 2885,1639.23 2951.77,1639.23 2952,1639 3086,1639 3086,1609 3085,1608 3085,1510 2803.41,1510 2802.41,1509 2802,1508.59 2802,1195 3692,1195 3694,1197 3696,1199 3696,1456 3696,1941 3693,1944 3692,1945 3396,1945 3173,1945 2885,1825 2886,1821
GND on Top Layer "Top Layer-No Net 1" (solid, remove dead copper, pour order 50): -1,2799 -1,1696.02 0.02,1695 9.02,1686 1190,1686 1190,1545 1330,1545 1330,1376 1330,1375 2017,1375 2016,1376 2016,1695 2016,2799 2015,2800 2013,2798 -1,2798
GND_L on Top Layer "Top Layer-No Net 1" (solid, remove dead copper, pour order 49): 825,1670 825,436.9 826,436 827,436.9 1665,436.9 1665,1026.45 1303,1026.45 1303,1530.49 1155,1530.49 1155,1670 825,1670
NetD71_1 on Top Layer "Top Layer-No Net 1" (solid, remove dead copper, pour order 48): 825,1375 825,1065 916,1065 917,1066 917,1037 917,994 918,993 985,993 985,1128 930,1128 930,1285 978,1285 940,1285 938.93,1286.07 938.93,1375 827,1375 826,1374
I_SENSE on Top Layer "Top Layer-No Net 1" (solid, remove dead copper, pour order 47): 2484,2065 2035,2065 2035,956 2034,955 1775,955 1775,942 1774,941 1775,942 1775,943 1775,937 1775,298 2750,298 2750,505 2595,505 2595,1185 2609,1185 2770,1185 2770,1410 2486,1410 2486,2065 2480,2065
+12V on Top Layer "Top Layer-No Net 1" (solid, remove dead copper, pour order 45): 1330,1344 1471.97,1344 1658,1157.13 1658,1054.85 1658,986 1570.86,986 1330,986 1330,1344
+12V on Top Layer "Top Layer-No Net 1" (solid, remove dead copper, pour order 42): 2809,1130 2809,871 2808,870 3022,870 3782,870 3786,874 3789,877 3789,1166 2844,1166 2809,1131
+12V on Top Layer "Top Layer-No Net 1" (solid, remove dead copper, pour order 41): 2526,1830 2526,1547 2525,1546 2736,1546 2852,1546 2852,1715 2852,1830 2526,1830
+12V on Top Layer "Top Layer-No Net 1" (solid, remove dead copper, pour order 40): 2086,2834 2085,2833 2085,2634 2085,2454 2086,2453 2196,2453 2606,2453 2606,2527 2606,2833 2605,2834 2087,2834
NetC54_2 on Top Layer "Top Layer-No Net 1" (solid, remove dead copper, pour order 39): 2440,2375 2440,2180 2440,2167 2441,2166 2442,2165 2500,2165 2500,1905 2568,1905 2862,1905 3430,2127 3012,2545 2725,2545 2725,2480 2630,2480 2630,2375 2440,2375
NetC44_2 on Top Layer "Top Layer-No Net 1" (solid, remove dead copper, pour order 37): 2780,610 2780,567 2780,335 2889,335 3686,335 3687,336 3687,776 3687,834 3688,835 3688,845 2940,845 2940,611 2941,610 2940,609 2779,609 2780,610
BAT+ on Top Layer "Top Layer-No Net 1" (solid, remove dead copper, pour order 34): 400,950 625,950 790,950 790,899 790,-13 24,-13 -9,-13 -10,-12 -10,66 -10,949 -11,950 400,950
BAT- on Top Layer "Top Layer-No Net 1" (solid, remove dead copper, pour order 32): 750,1670 465,1670 211,1670 -27,1670 -27,1566.8 -27,1300.71 58,1300.71 -27,1300.71 -27,1000.21 -27,983.01 -26,982 59,982 791,982 791,1108.47 791,1670 750,1670
+12V on Bottom Layer "Top Layer-No Net 1" (solid, remove dead copper, pour order 62): 823,403 823,287 824,286 824,-19 3648,-19 3652,-15 3698,31 3698,32 3698,2878 3696,2880 2232,2880 2083,2880 2081,2882 2085,2878 2085,2717 2085,2410 2086,2409 2581,2409 2581,2406 2866,2121 2868,2119 2868,1859 2517.51,1859 2515,1856.49 2515,1509 3149,1509 3153,1505 3152,1504 3152,1170 2806,1170 2805,1171 2805,720 3159,720 3162,717 3162,264 1666,264 1665,265 1667,267 1670,267 1670,403 1669,402 824,402
I_SENSE on Bottom Layer "Top Layer-No Net 1" (solid, remove dead copper, pour order 58): 2035,2065 2035,955 2033,957 1775,957 1775,302 1777,300 1777.83,300.83 2749,300.83 2749,667 2748,668 2649,668 2595,668 2593,670 2593,1065 2767,1065 2769,1067 2770,1068 2770,1410 2486,1410 2486,2063.61 2039.39,2063.61 2037,2066
GND on Bottom Layer "Top Layer-No Net 1" (solid, remove dead copper, pour order 57): 0,2796 0.02,2795.98 0.02,2720 0.02,1693.98 9,1685 12,1688 1196,1688 1192,1688 1191,1687 1191.64,1686.36 1191.64,1545 1330,1545 1330,1375 1702,1375 1702,1276 1702,986 1704,988 1999,988 2015,988 2015,1111 2015,2795.15 2016,2796.15 2015.15,2797 2,2797
NetC54_2 on Bottom Layer "Top Layer-No Net 1" (solid, remove dead copper, pour order 55): 2440,2385 2440,2084 2514,2084 2514,1890.91 2514.96,1889.95 2835,1889.95 2835,2118.93 2568.93,2385 2440,2385
+12V on Bottom Layer "Top Layer-No Net 1" (solid, remove dead copper, pour order 54): 1330,1350 1330,986 1669.99,986 1670,986.01 1670,1223 1670,1350 1330,1350
GND_L on Bottom Layer "Top Layer-No Net 1" (solid, remove dead copper, pour order 51): 825,1670 825,426 1673,426 1673,1020.76 1307.55,1020.76 1307.55,1529.26 1158.14,1529.26 1158.14,1670 825,1670
NetC64_2 on Bottom Layer "Top Layer-No Net 1" (solid, remove dead copper, pour order 38): 2805,1195 3120,1195 3120,1490 3058,1490 2805,1490 2805,1195
NetC44_2 on Bottom Layer "Top Layer-No Net 1" (solid, remove dead copper, pour order 36): 2780,300 3135,300 3135,352 3135,653 3005,653 2780,653 2780,299
BAT+ on Bottom Layer "Top Layer-No Net 1" (solid, remove dead copper, pour order 35): -36,944 790,944 791,945 790,944 790,817 790,-19 -9,-19 -32,-19 -33,-18 -36,-15 -36,943
BAT- on Bottom Layer "Top Layer-No Net 1" (solid, remove dead copper, pour order 33): -28.02,1667 -28.02,1669 790.03,1669 791.02,1670 792,1669 792,1551 792,971 791.02,970 518.66,970 -26.05,970 -28.02,972 -29,973 -29,1668
GND_L on GND "Top Layer-No Net 1" (solid, remove dead copper, pour order 60): 823,1670 823,-19 3491,-19 3491,278 3490,279 3488,281 2704,281 1751,281 1750,282 1749,283 1749,464 1749,955 1305,955 1305,1517 1160,1517 1160,1666 1158,1668 1155,1671 823,1671
GND on GND "Top Layer-No Net 1" (solid, remove dead copper, pour order 53): -19,1686 -18,1685 33,1685 1192,1685 1192,1625 1192,1545 1193,1544 1330,1544 1330,986 1332,984 1334,986 1784,986 1997,986 1998,987 2015,1004 2015,1415 2015,2814 2013,2816 -19,2816 -19,1687
BAT- on GND "Top Layer-No Net 1" (solid, remove dead copper, pour order 52): 790,1671 788,1670.07 -16,1670.07 -16,1629.35 -19,1627.96 -20,1627.5 -20,898.11 -20,887 126,887 790,887 790,957.81 790,1670.07 788,1670.07 789,1670.54
NetC44_2 on GND "Top Layer-No Net 1" (solid, remove dead copper, pour order 46): 2942,854 2942,624 2780,624 2780,569.4 2780,290 3692,290 3692,853 3692,854 2942,854
NetC64_2 on GND "Top Layer-No Net 1" (solid, remove dead copper, pour order 44): 2800,1504 2800,1492 2800,1195 2814,1195 3686,1195 3686,1200 3686,1696 3685,1695 3489,1695 3167,1695 2978,1506 2977,1505 2800,1505 2800,1503
NetC54_2 on GND "Top Layer-No Net 1" (solid, remove dead copper, pour order 43): 2500,1890 2535,1890 3510,1890 3510,1978 3510,2410 3349,2410 3510,2410 3510,2400 2534,2400 2441,2400 2441,2335 2440,2334 2440,2165 2500,2165 2500,1890
VDDX on POWER (split plane): 1068.91,2601 1068.91,2599 1068.91,2443 1068.91,2197 1068.91,1946 1069.26,1943.39 1070.27,1940.96 1071.87,1938.87 1073.96,1937.26 1076.39,1936.26 1079,1935.91 1164.91,1935.91 1164.91,1720.09 812.09,1720.09 812.09,1856.91 933,1856.91 935.61,1857.26 938.04,1858.26 940.13,1859.87 941.74,1861.96 942.74,1864.39 943.09,1867 943.09,1924 943.09,2116 943.09,2200 942.74,2202.61 941.74,2205.04 940.13,2207.13 938.04,2208.74 935.61,2209.74 933,2210.09 507.09,2210.09 507.09,2225 507.09,2316 507.09,2480 507.09,2624 507.09,2776.05 1068.91,2776.05
VDDA on POWER (split plane): 1390.91,1656 1390.91,1557 1390.91,1538.09 1185.09,1538.09 1185.09,1710 1185.01,1710.6 1185.09,1711.2 1185.09,1935.91 1390.91,1935.91
BAT+ on POWER (split plane): 796.91,20.97 50.02,20.97 49.52,20.92 45.34,21.25 40.76,22.35 36.41,24.15 32.4,26.61 28.82,29.67 25.76,33.24 23.3,37.26 21.5,41.61 20.4,46.18 20.07,50.37 20.12,50.87 20.12,950.91 796.91,950.91
+12V on POWER (split plane): 177 vertices, not listed, extent 20.12,20.92 3652.06,2776.05

## Keep-outs
Keep-Out Layer:
  circle w5: c88.94,1770 r59.06
  circle w5: c89.94,510 r59.06
  lines w5: 2608.61,2796.15 cw(c1665.04,1024.75) 3672.07,1024.5 ; 2608.61,2796.15 50.02,2796.15 ccw(c50.02,2746.15) 0.02,2746.15 0.02,50.87 ccw(c50.02,50.87) 50.02,0.87 3622.07,0.87 ccw(c3622.07,50.87) 3672.07,50.87 3672.07,1024.5

## Other copper
POWER (plane layer: these items are gaps in the copper):
  rectangle: 16,2188 496,2779
  rectangle: 1402,1356 1921.91,1962
  rectangle: 1907,1359 1927,1361
  rectangle: 1079,1954 1936,2783
  rectangle: 16,968 800,1587
  rectangle: 1088,2019 1296,2245
  rectangle: 2539,1905 2815,2146
  rectangle: 2810,334 3083,578
  rectangle: 2817,1251 3100,1492
  lines w20: 5,961 807,961 ; 5,1594 226,1594 576,1594 808,1594 807,1555 807,1162 807,-2 ; 497,2795 497,2624 497,2480 497,2316 497,2225 497,2200 644,2200 794,2200 933,2200 933,2116 933,1924 933,1867 802,1867 802,1710 1175,1710 1175,1528 1257,1528 1401,1528 1401,1557 1401,1656 1401,1946 1183,1946 1079,1946 1079,2197 1079,2443 1079,2601 ; 1079,2599 1079,2800 ; 1175,1711.2 1175,1940 ; 1401,1530 1400,1354 1743,1354 1932,1354 1932,1497 1932,1960 1932,2485 1932,2799

## Silkscreen, mask and mechanical layers (free items; w line width, h text height)
Top Overlay:
  text "P450_FJ_PA_V2.3_F" at 1761,231 h60
Bottom Overlay:
  text "W" at 3152,2086 h60
  text "V" at 3524,1293 h60
  text "U" at 3456,773 h60
Mechanical 1:
  circle w5: c204.07,2462 r66.93
  circle w5: c2632.7,859.14 r66.93
  circle w5: c916.17,662.29 r66.93
  circle w5: c2164.2,2225.28 r66.93
  circle w5: c203.57,2461.5 r66.93
  lines w5: 2608.61,2796.15 cw(c1665.04,1024.75) 3672.07,1024.5 ; 2608.61,2796.15 50.02,2796.15 ccw(c50.03,2746.15) 0.02,2746.15 0.02,50.87 ccw(c50.03,50.88) 50.02,0.87 3622.07,0.87 ccw(c3622.07,50.88) 3672.07,50.87 3672.07,1024.49 ; 30.34,504.65 30.34,516.31 32.62,527.72 37.07,538.47 43.53,548.12 51.76,556.35 61.4,562.8 72.15,567.25 83.57,569.53 95.22,569.53 106.64,567.25 117.39,562.8 127.03,556.35 135.26,548.12 141.72,538.47 146.17,527.72 148.45,516.31 148.45,504.65 146.17,493.23 141.72,482.49 135.26,472.84 127.03,464.61 117.39,458.16 106.64,453.71 95.22,451.42 83.57,451.42 72.15,453.71 61.4,458.16 51.76,464.61 43.53,472.84 37.07,482.49 32.62,493.23 30.34,504.65 ; 30.34,1764.5 30.34,1776.15 32.62,1787.57 37.07,1798.31 43.53,1807.96 51.76,1816.19 61.4,1822.65 72.15,1827.09 83.57,1829.38 95.22,1829.38 106.64,1827.09 117.39,1822.65 127.03,1816.19 135.26,1807.96 141.72,1798.31 146.17,1787.57 148.45,1776.15 148.45,1764.5 146.17,1753.08 141.72,1742.33 135.26,1732.68 127.03,1724.46 117.39,1718 106.64,1713.55 95.22,1711.27 83.57,1711.27 72.15,1713.55 61.4,1718 51.76,1724.46 43.53,1732.68 37.07,1742.33 32.62,1753.08 30.34,1764.5 ; 122.86,723.08 cw(c122.86,746.7) 122.86,770.32 292.15,770.32 cw(c292.15,746.7) 292.15,723.08 122.86,723.08 ; 122.86,1510.48 cw(c122.86,1534.1) 122.86,1557.72 292.15,1557.72 cw(c292.15,1534.1) 292.15,1510.48 122.86,1510.48 ; 172.07,1038.04 cw(c172.07,1061.66) 172.07,1085.28 242.94,1085.28 cw(c242.94,1061.66) 242.94,1038.04 172.07,1038.04 ; 172.07,1195.52 cw(c172.07,1219.14) 172.07,1242.76 242.94,1242.76 cw(c242.94,1219.14) 242.94,1195.52 172.07,1195.52